# Altium PCB MGMEZZ04.PcbDoc (part 1 of 9)
Units mil, origin at the board's own origin, x right, y up, seen from the top; angles counter-clockwise.
Board outline 3790 x 5472.44 mil, 10 copper layers (TopLayer, InternalPlane1, MidLayer1, InternalPlane2, MidLayer2, MidLayer3, InternalPlane3, MidLayer4, InternalPlane4, BottomLayer), stack 57.08 mil thick; 846 components, 745 nets, 3323 pads, 1906 vias.
Unrouted connection lines stored in the file: 128.
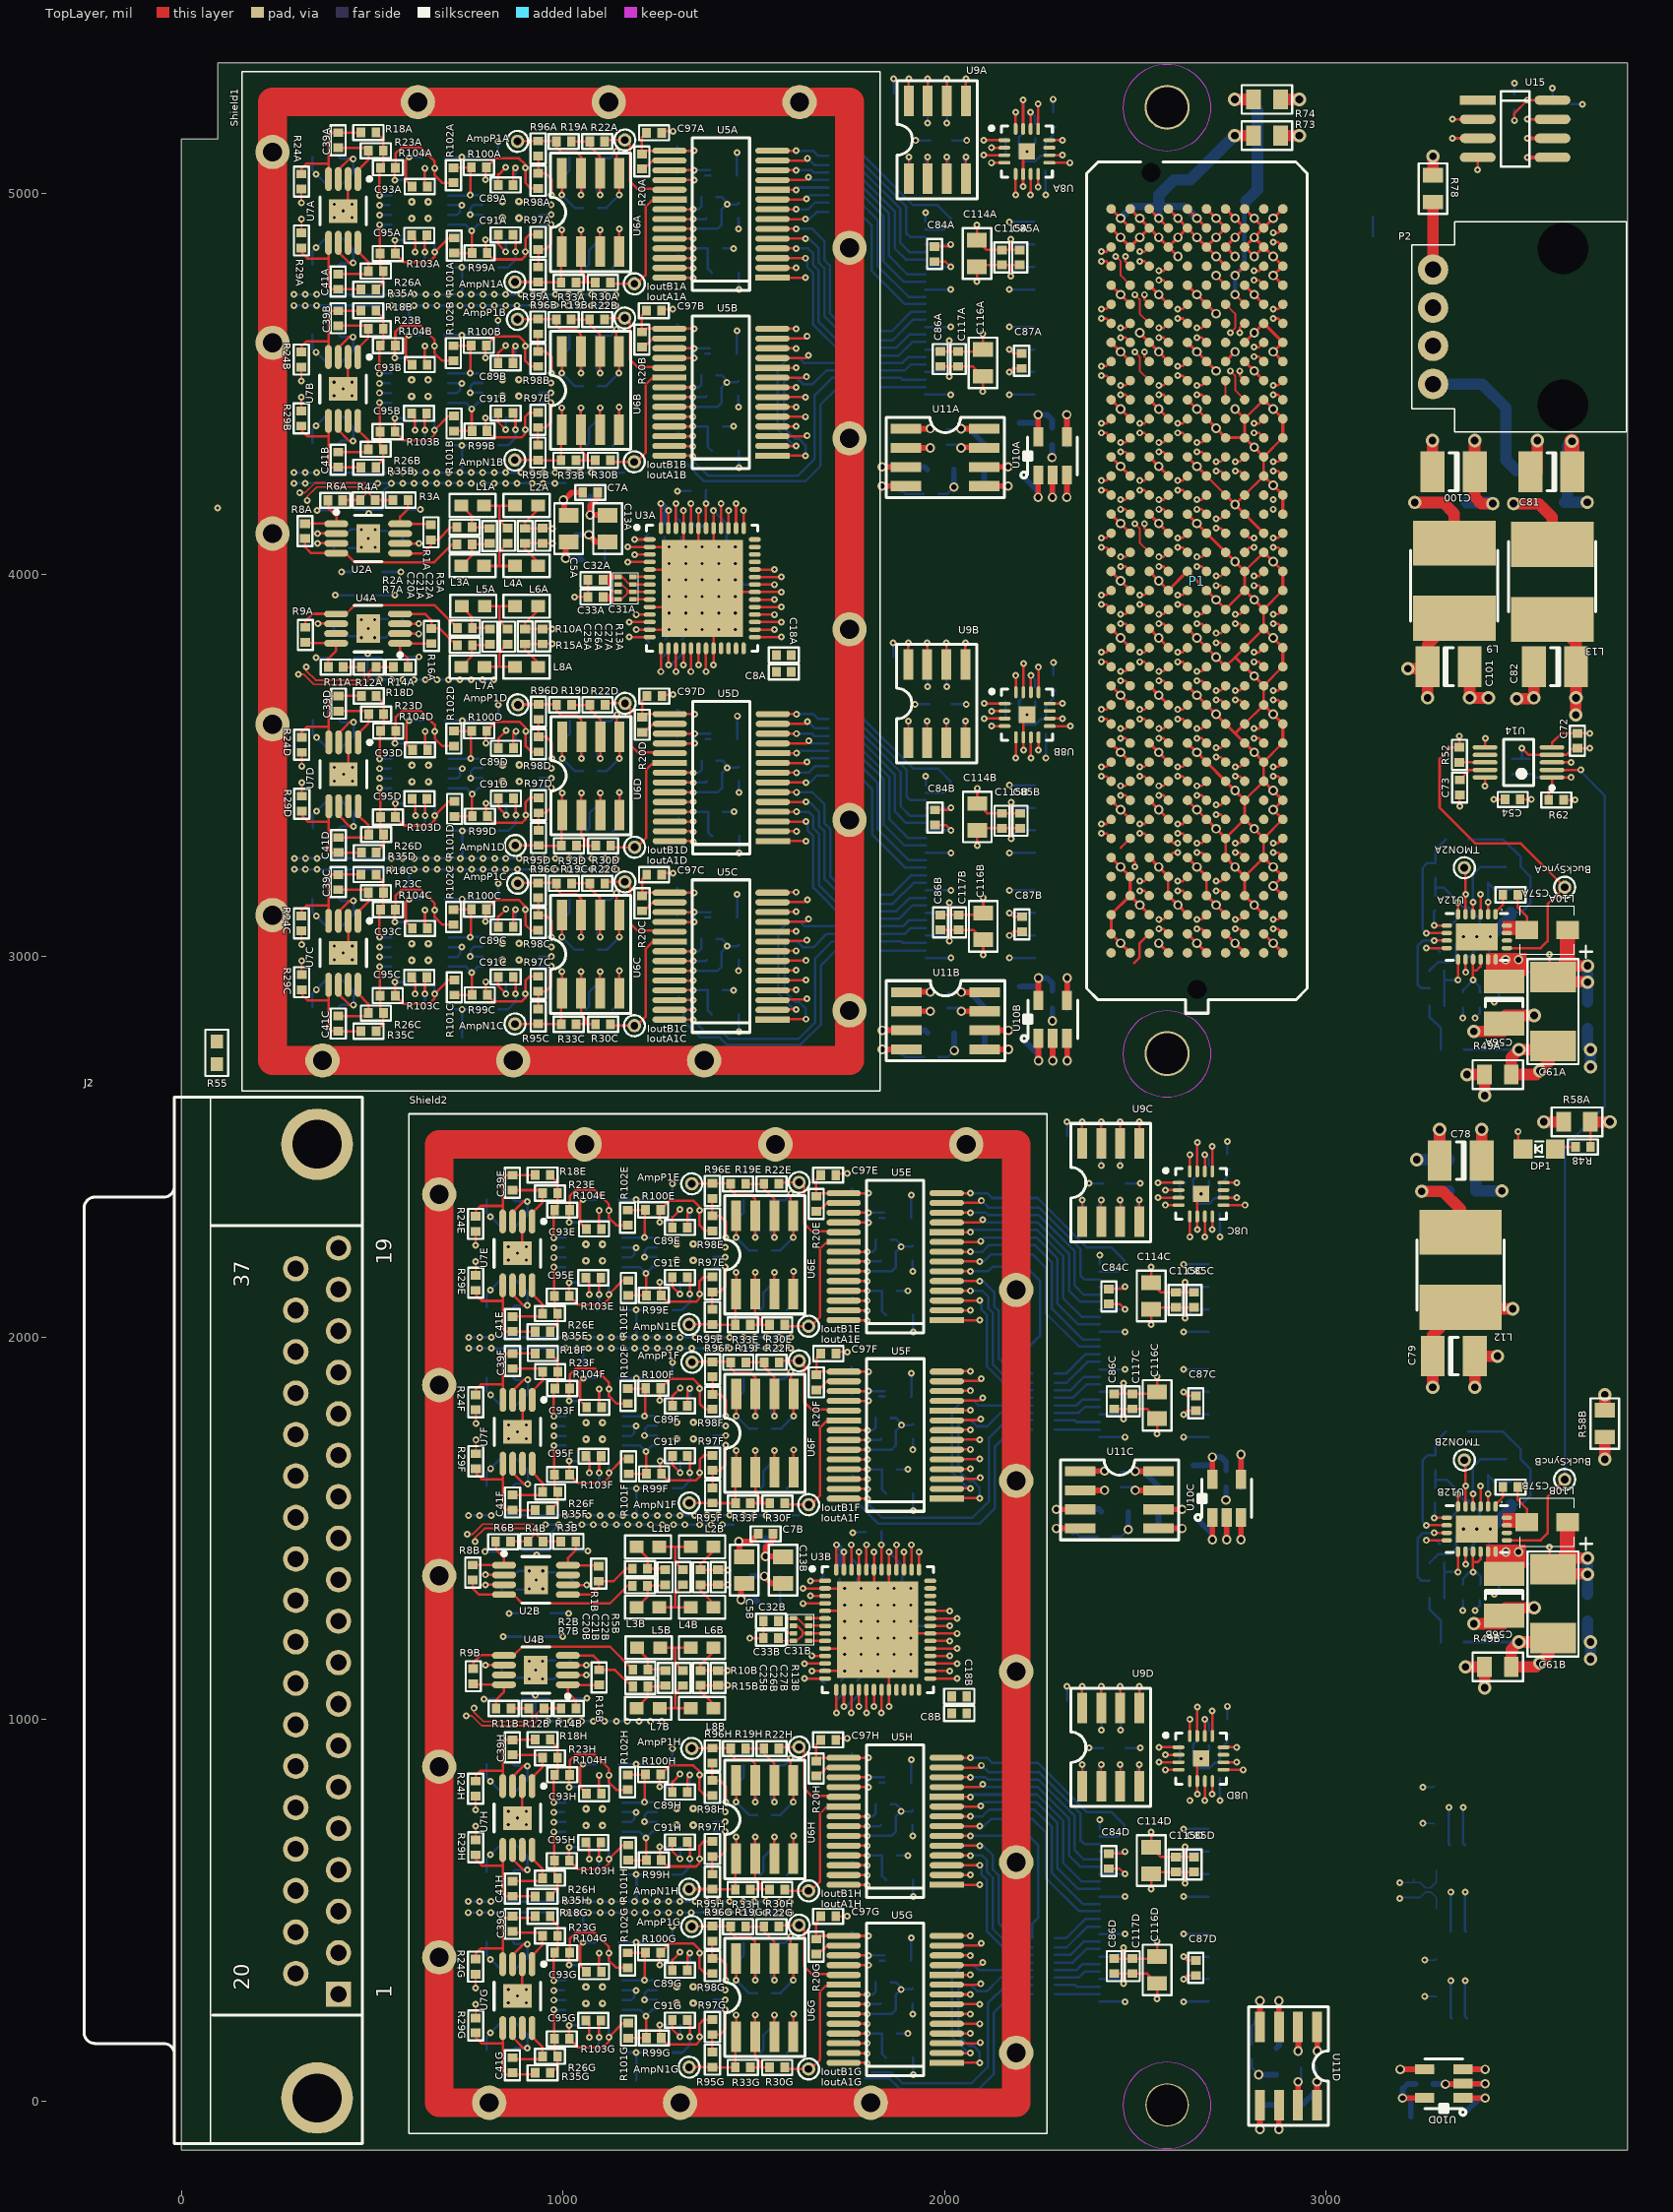
[diagram p0: TopLayer view]
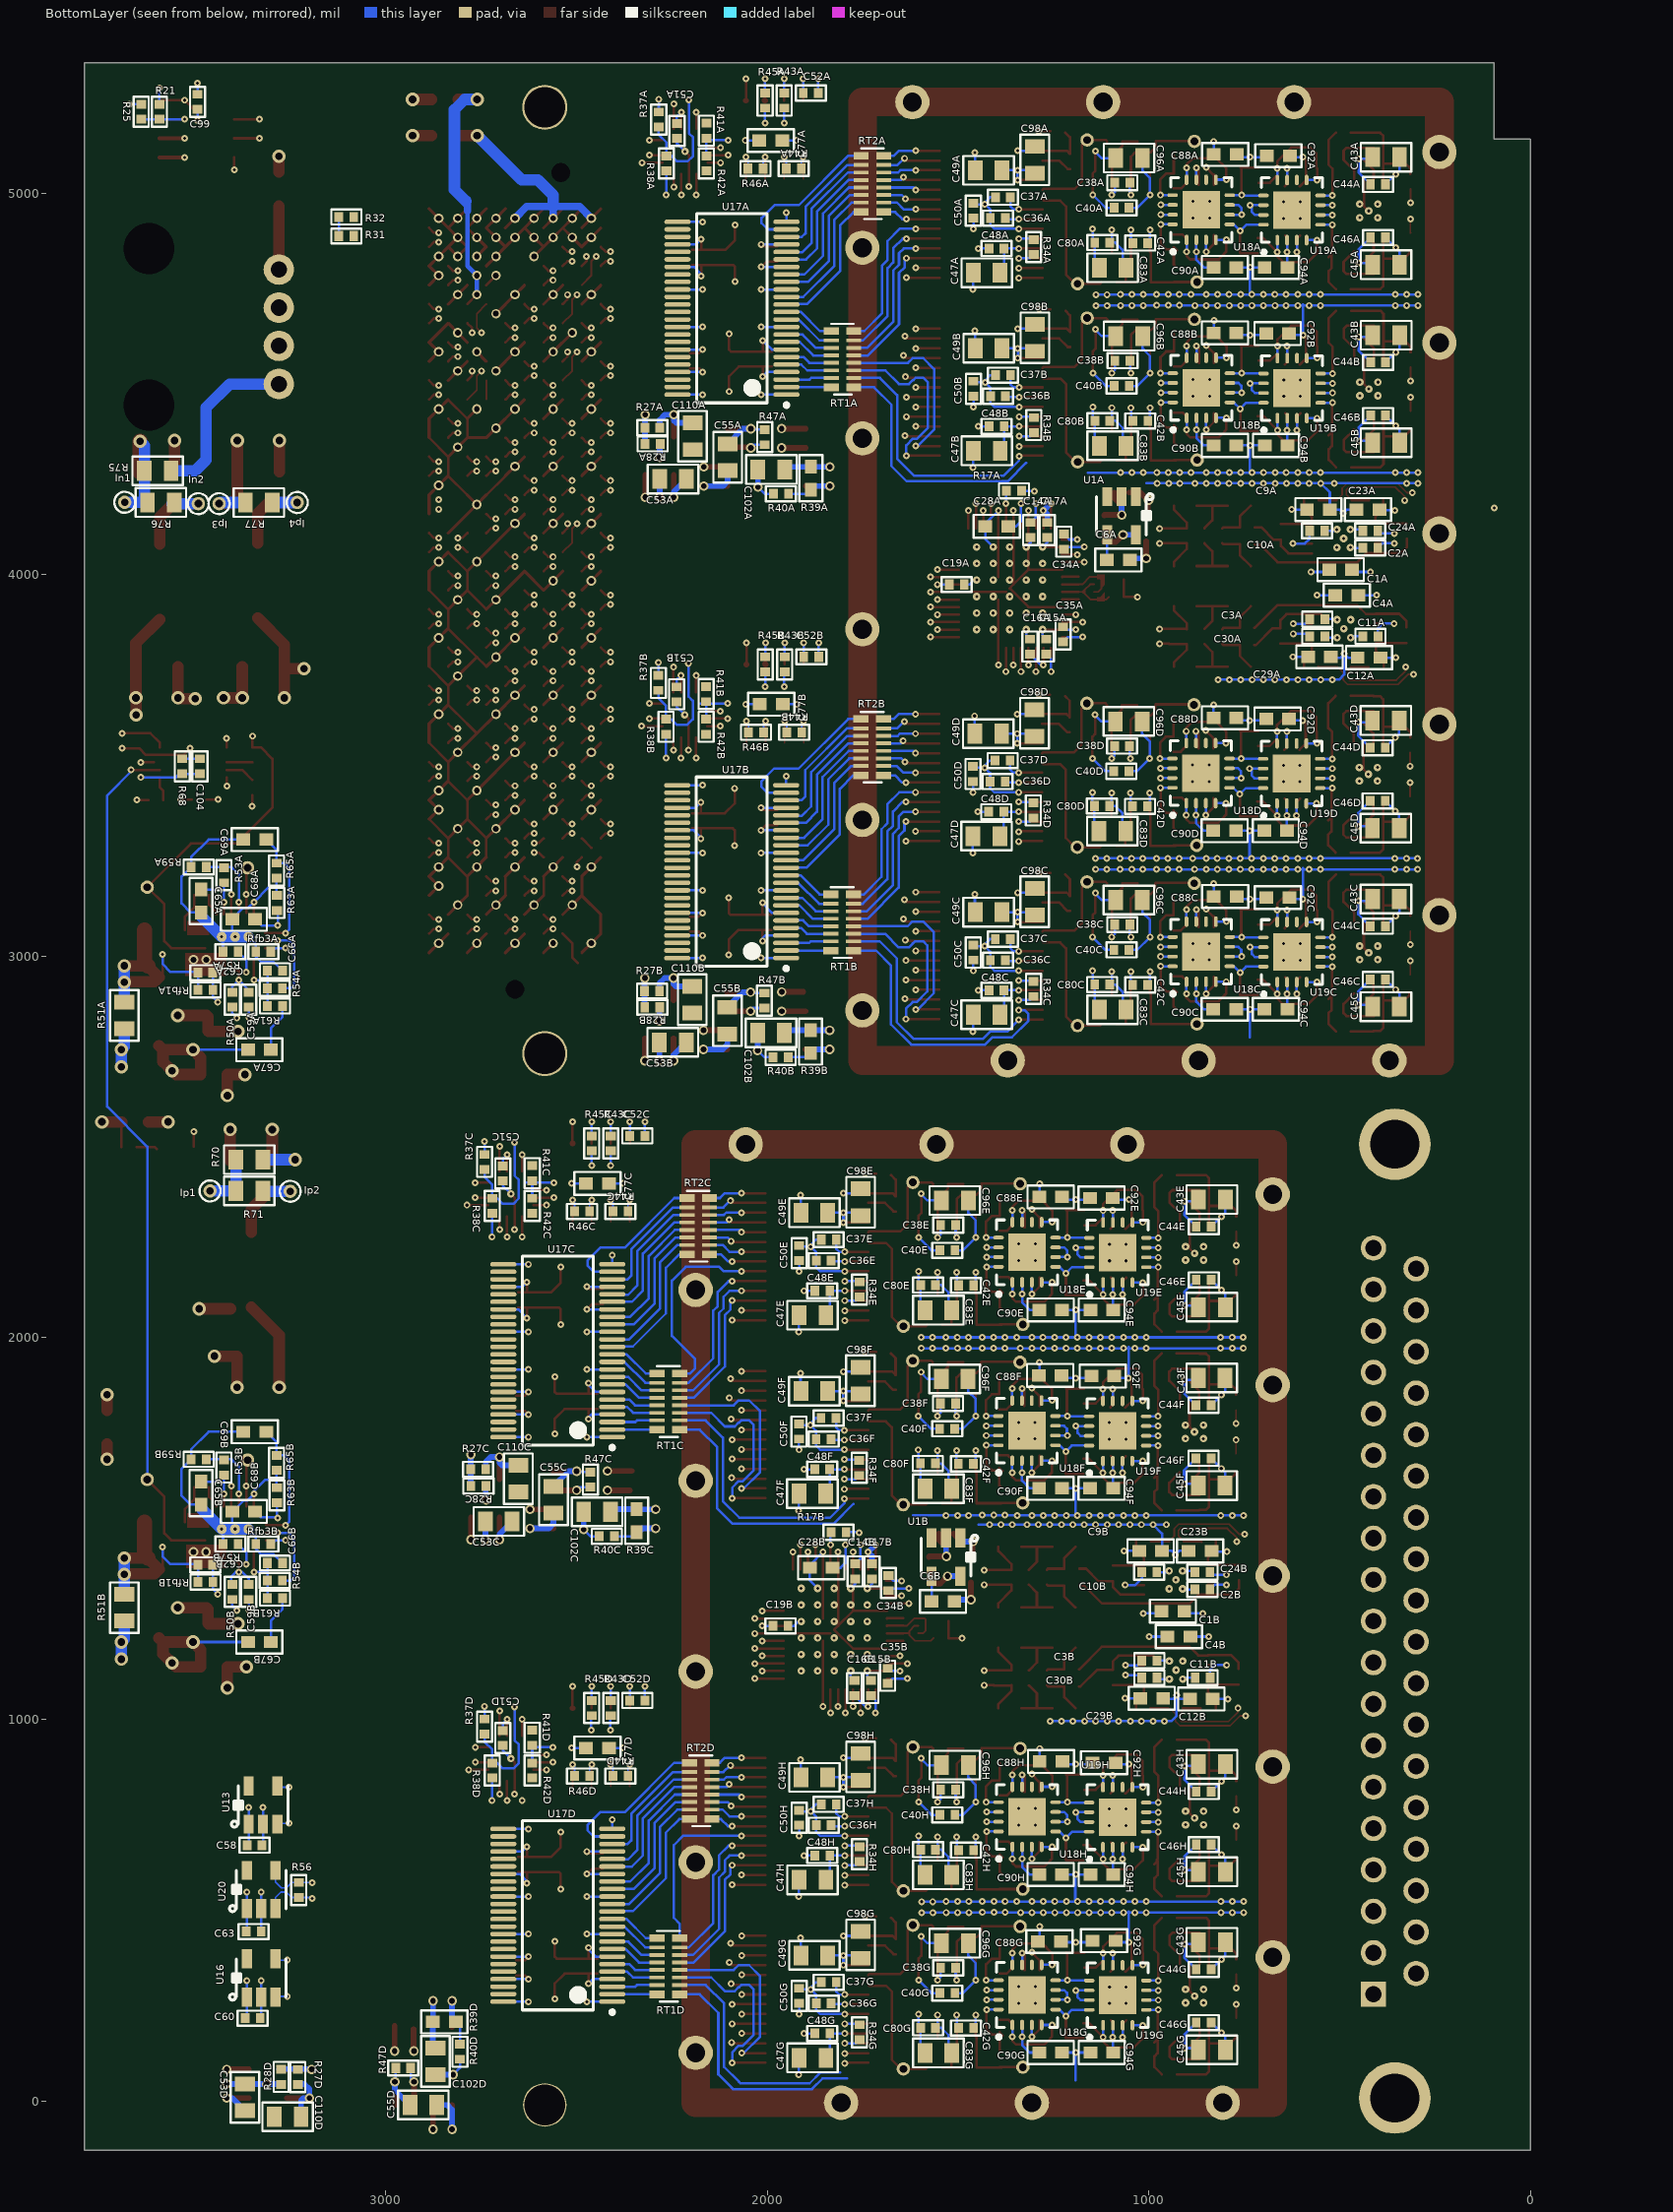
[diagram p1: BottomLayer view, seen from below]
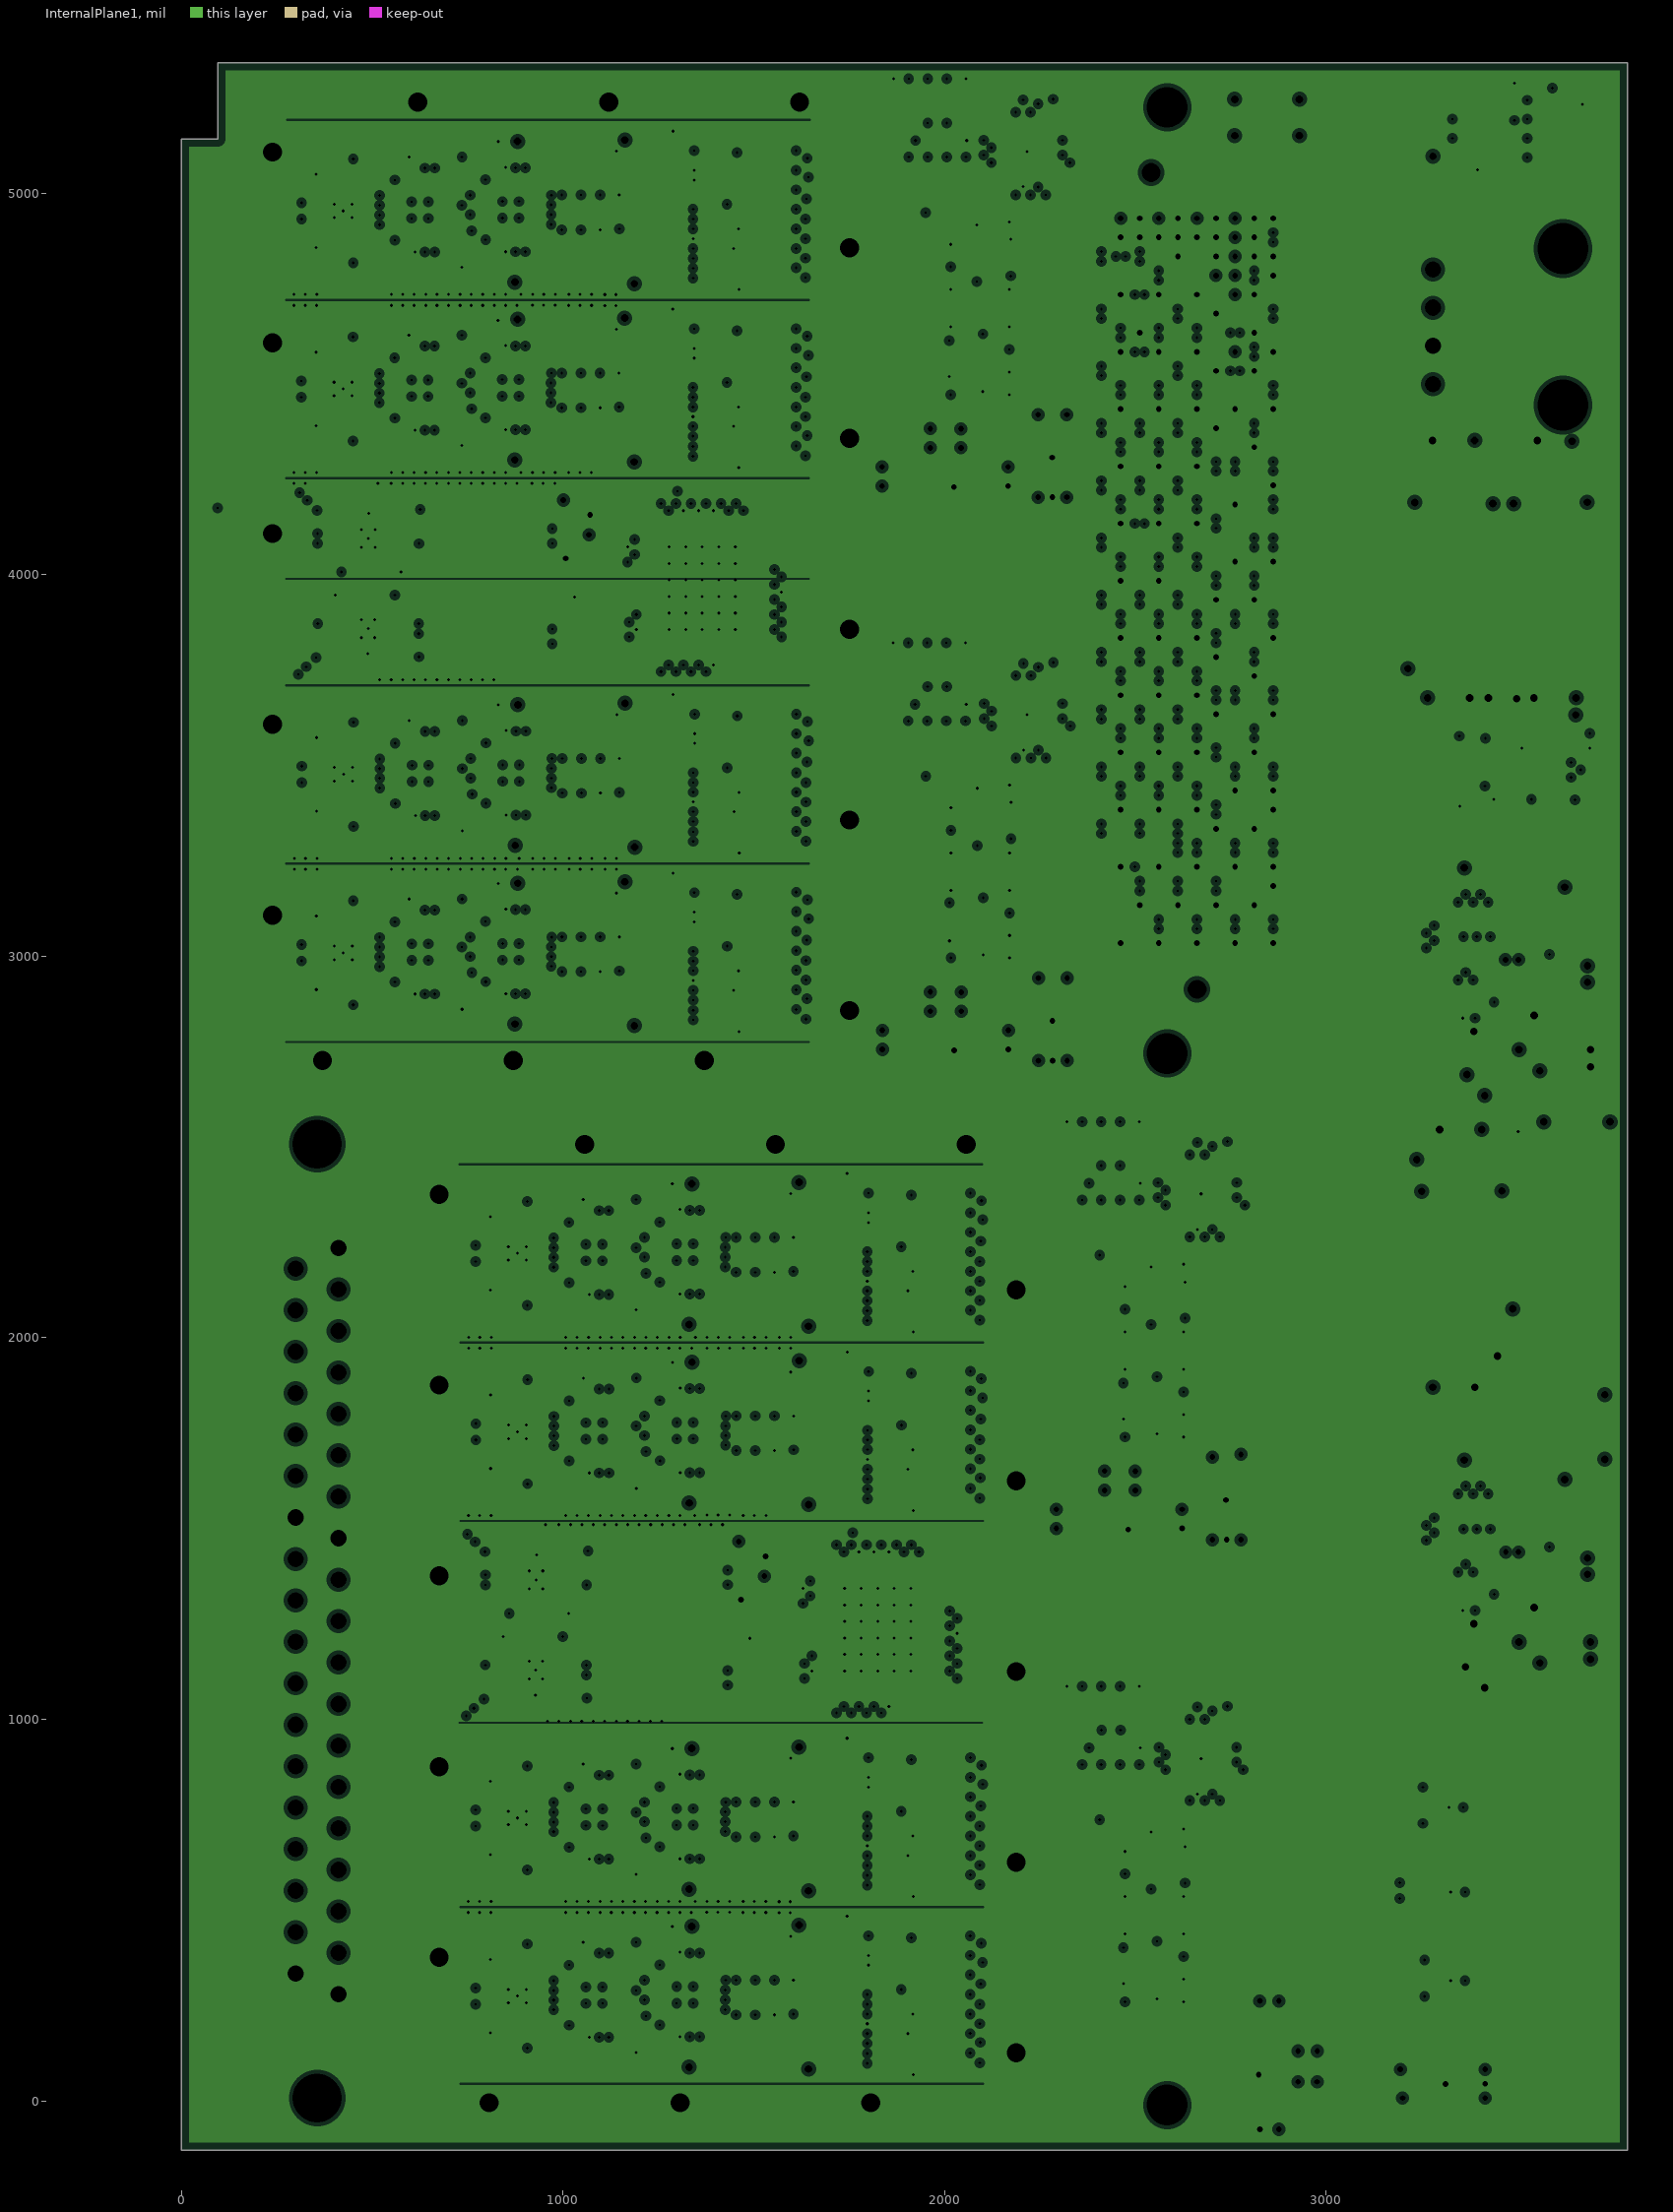
[diagram p2: InternalPlane1, clearances drawn from the general rule]
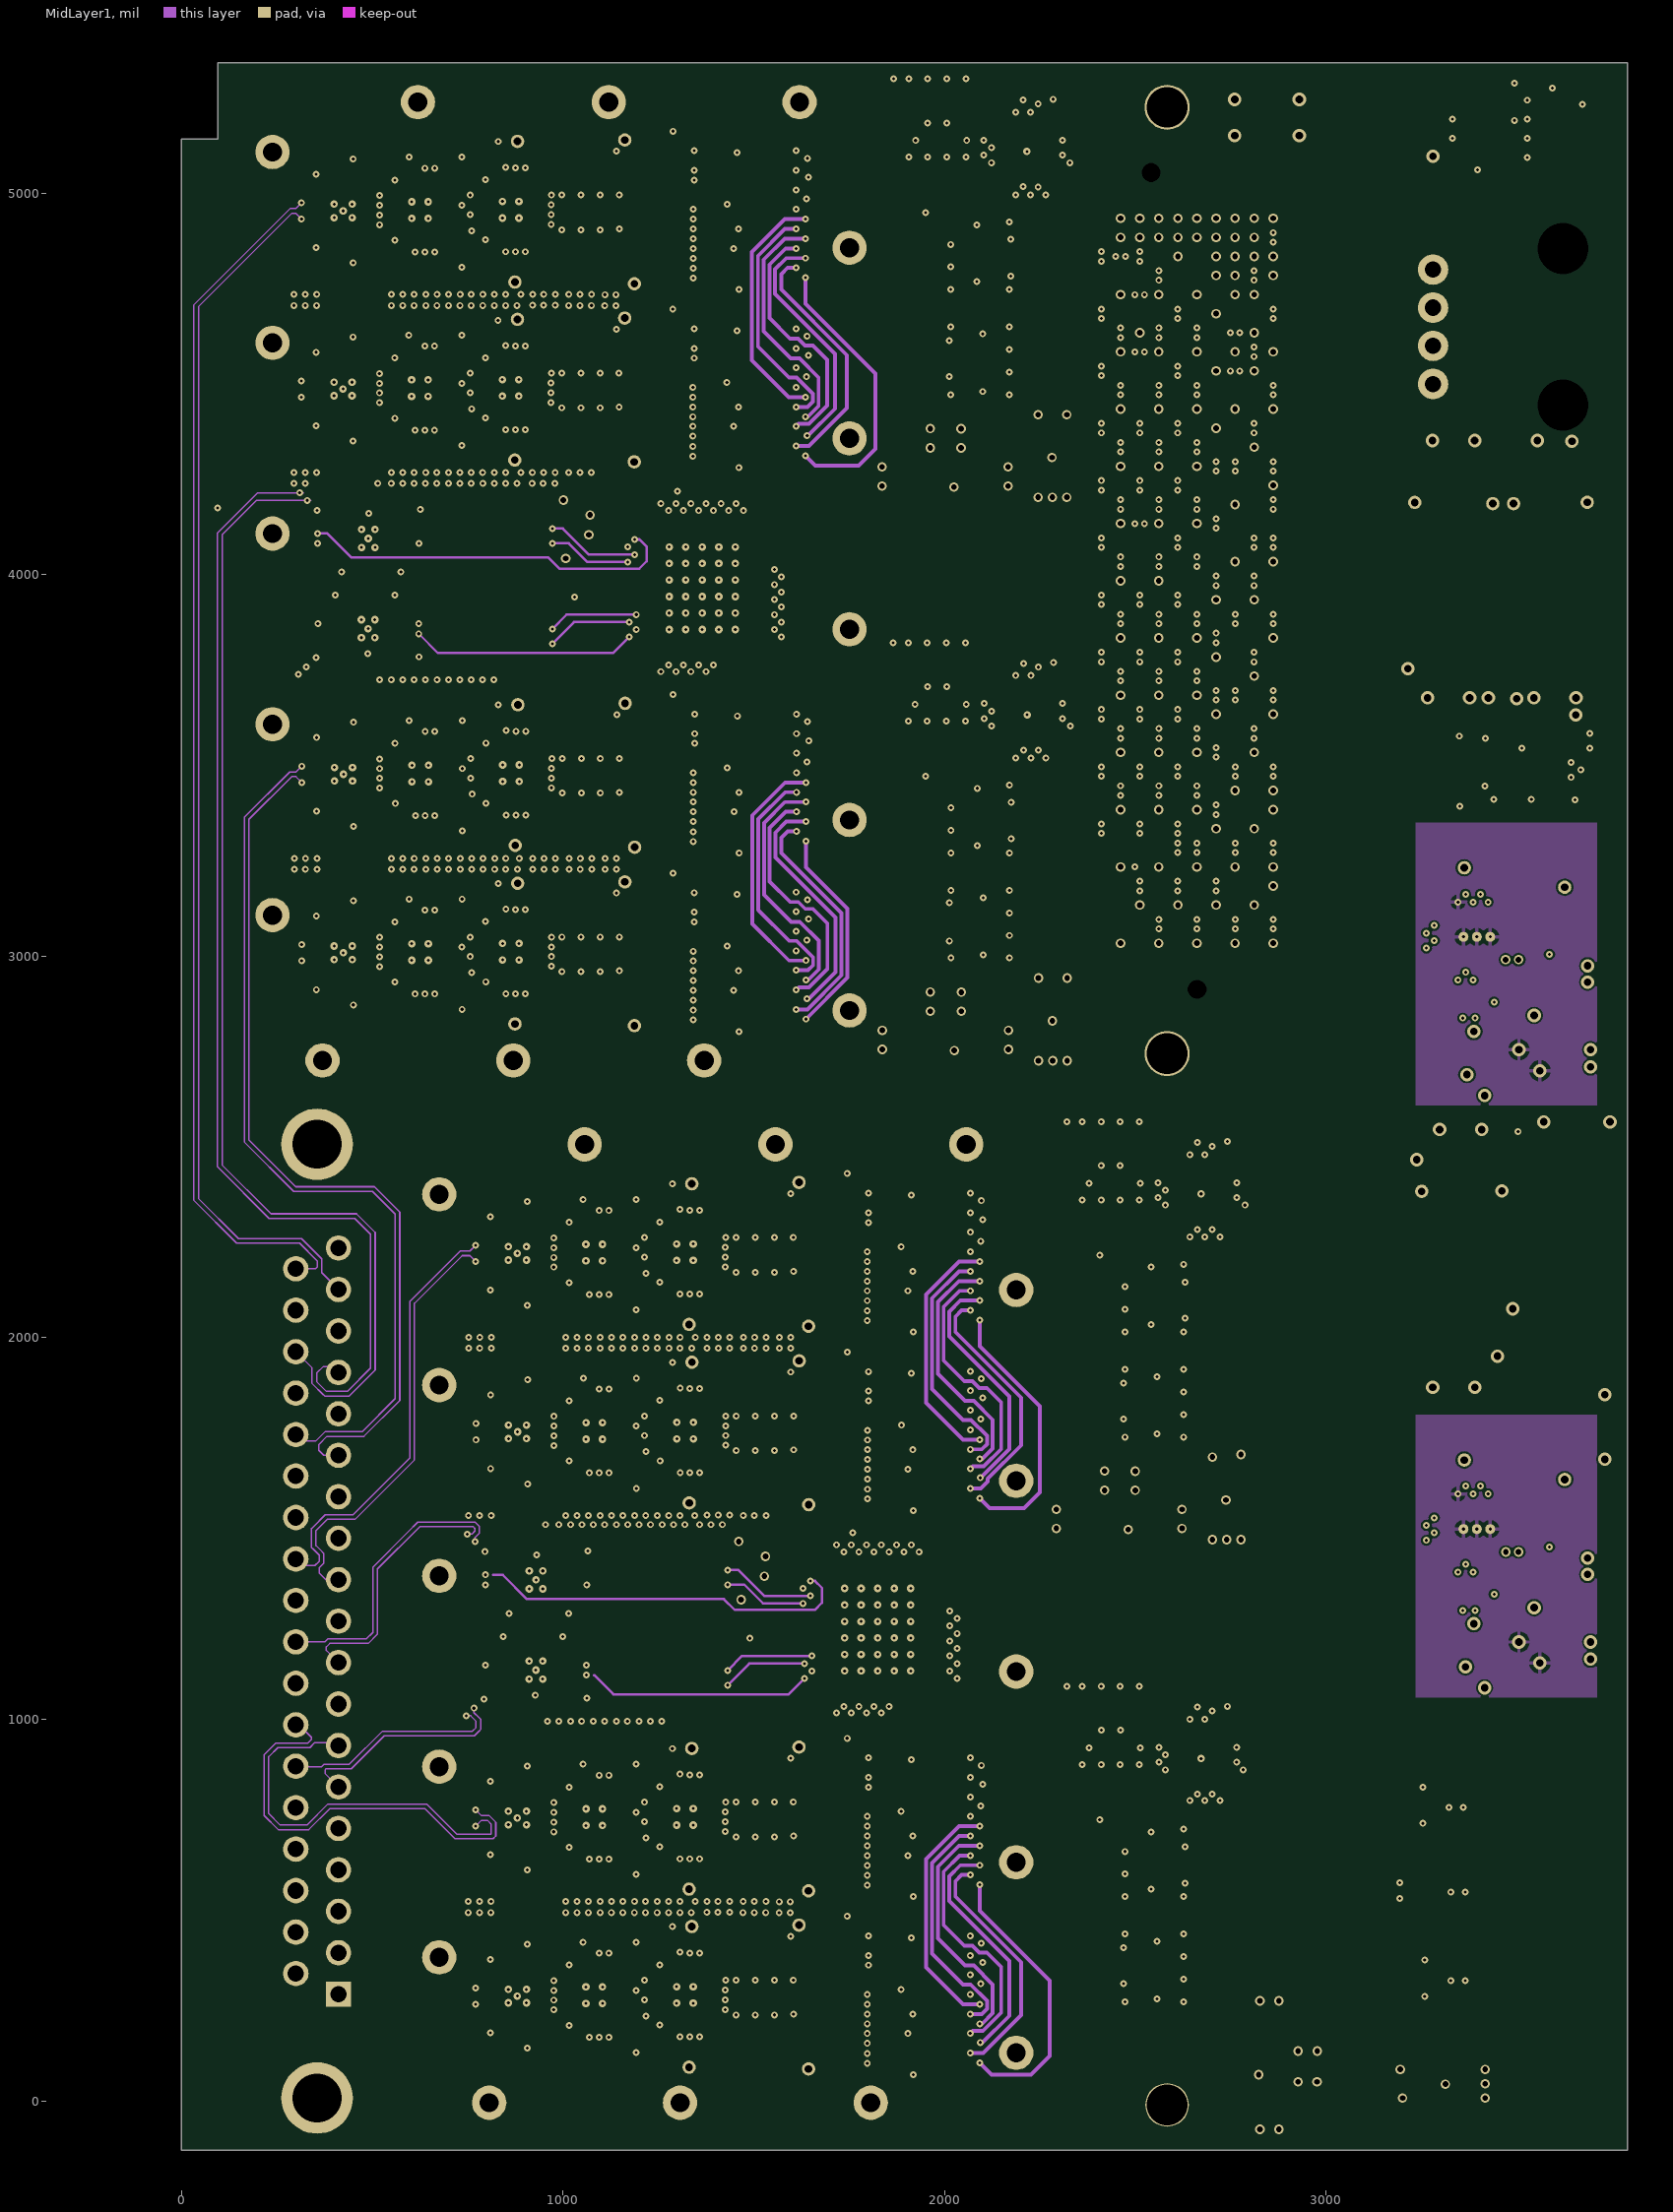
[diagram p3: MidLayer1]
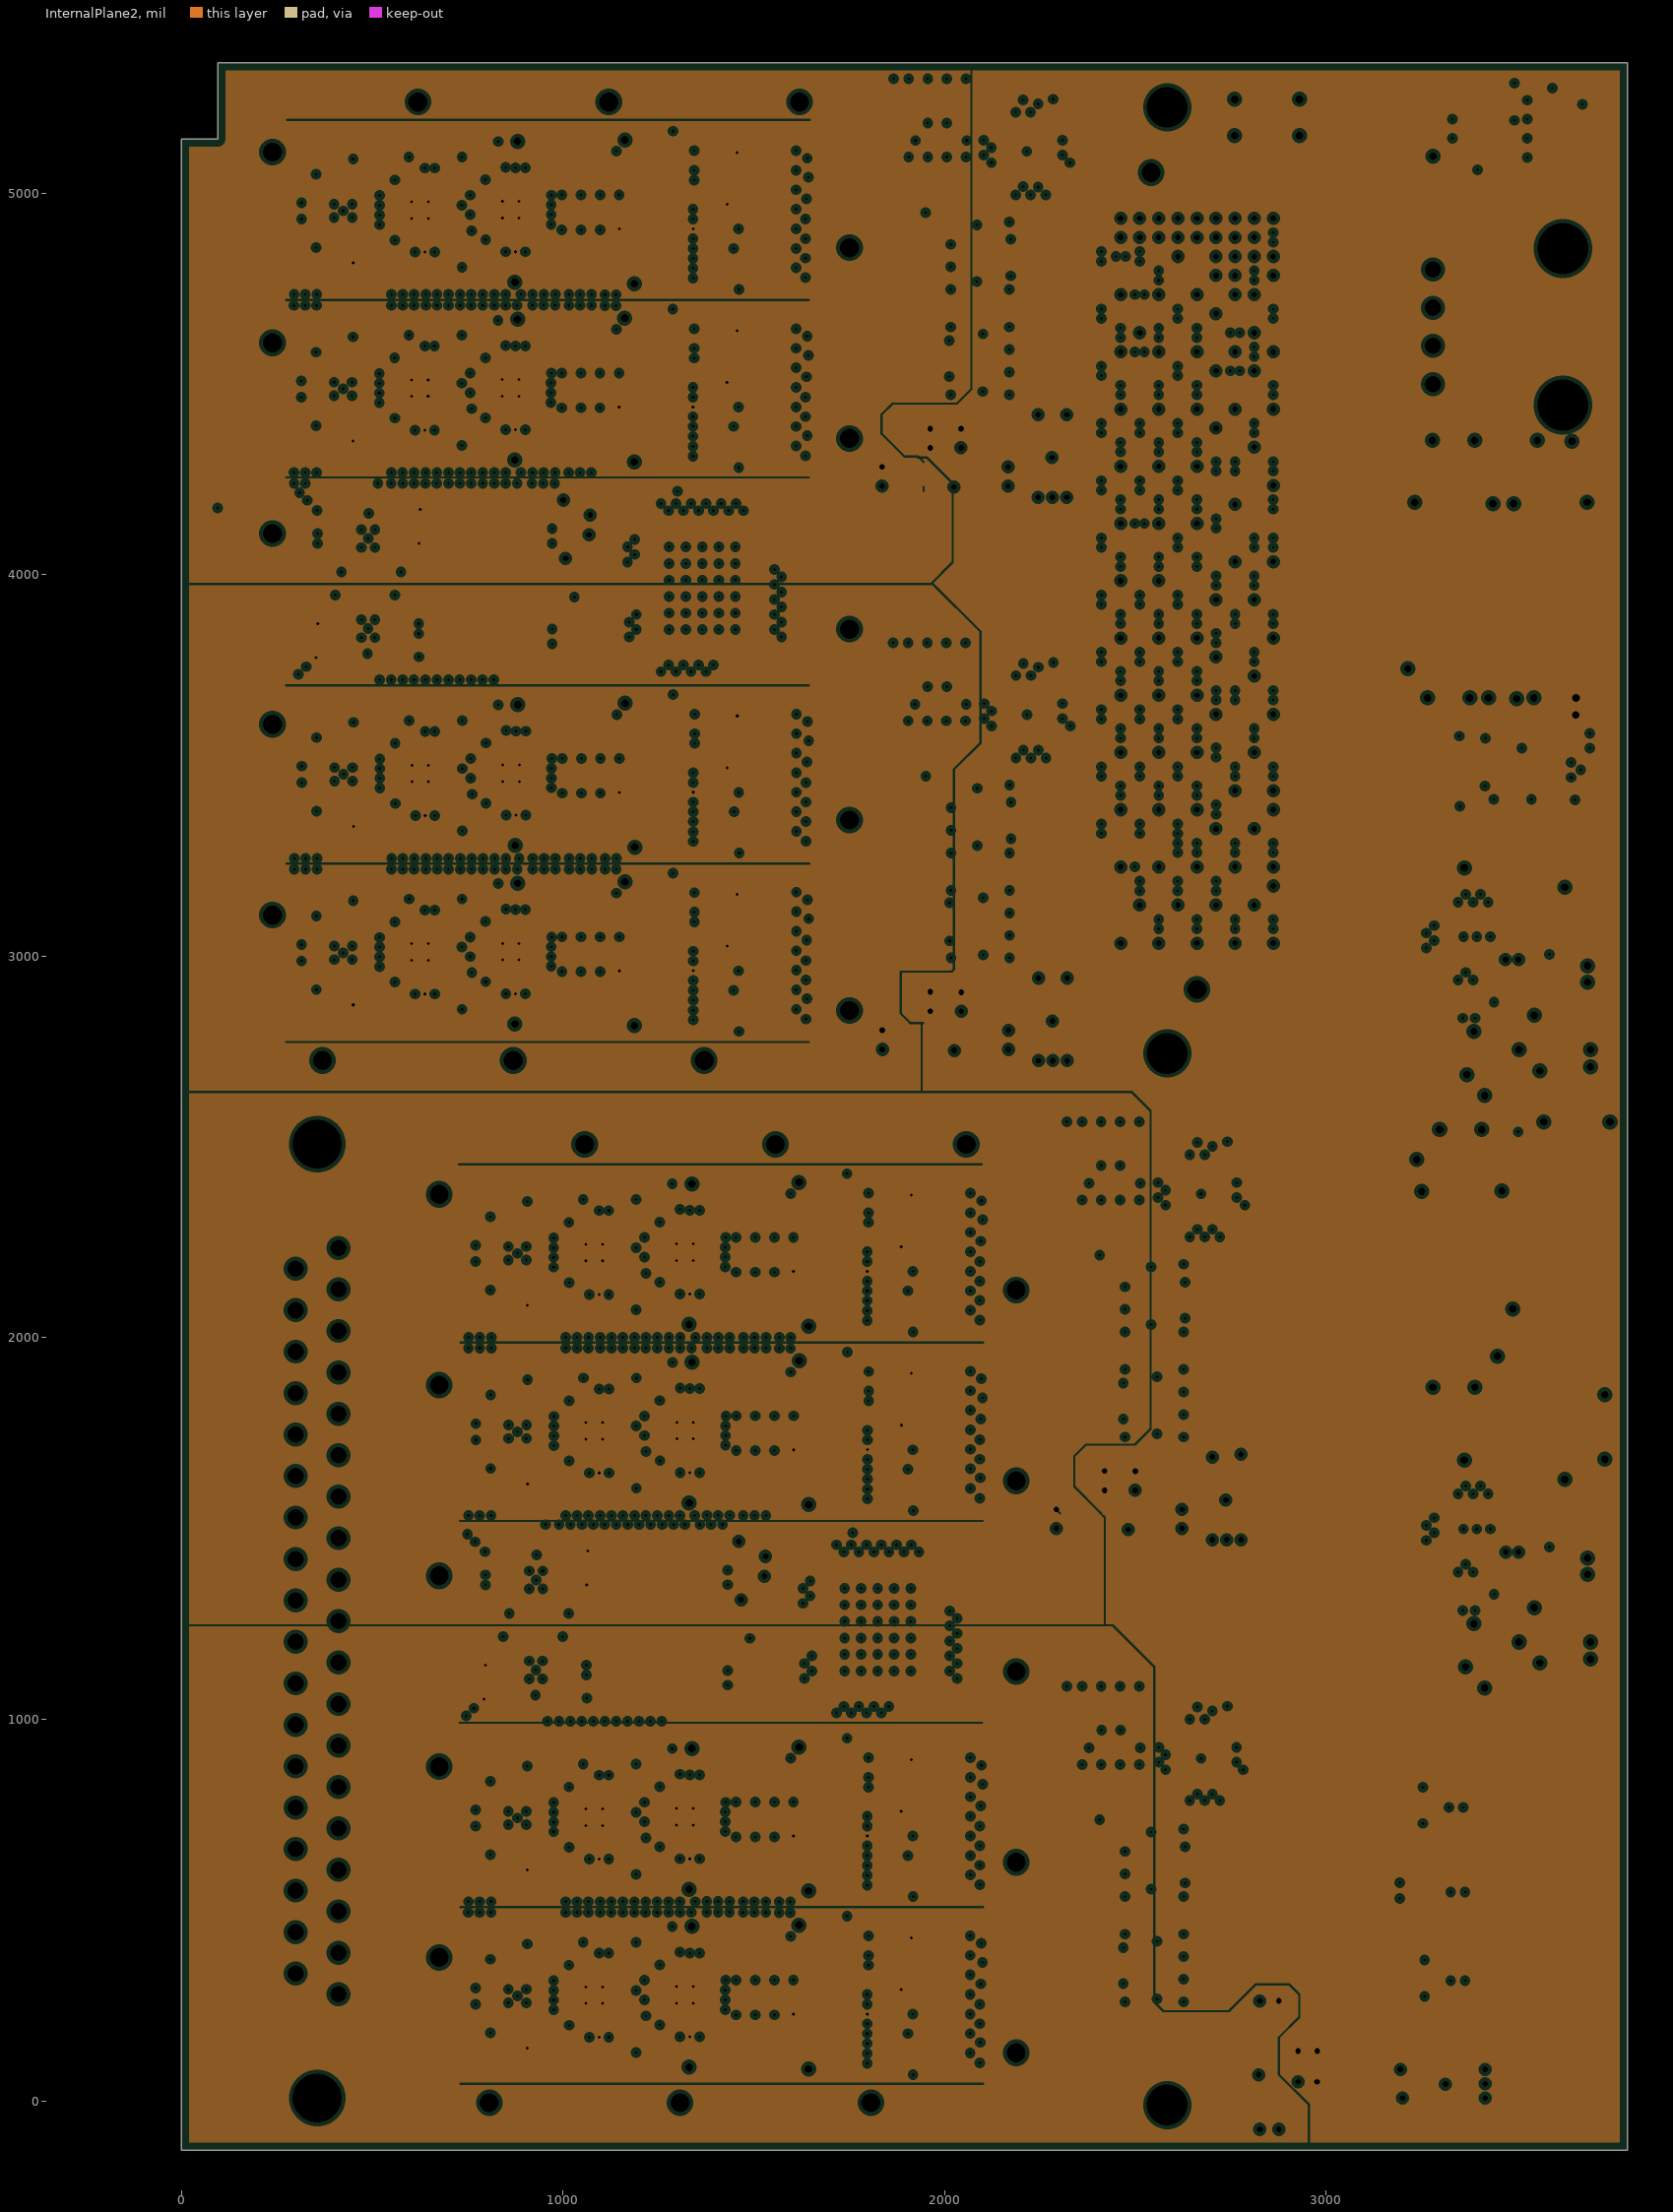
[diagram p4: InternalPlane2, clearances drawn from the general rule]
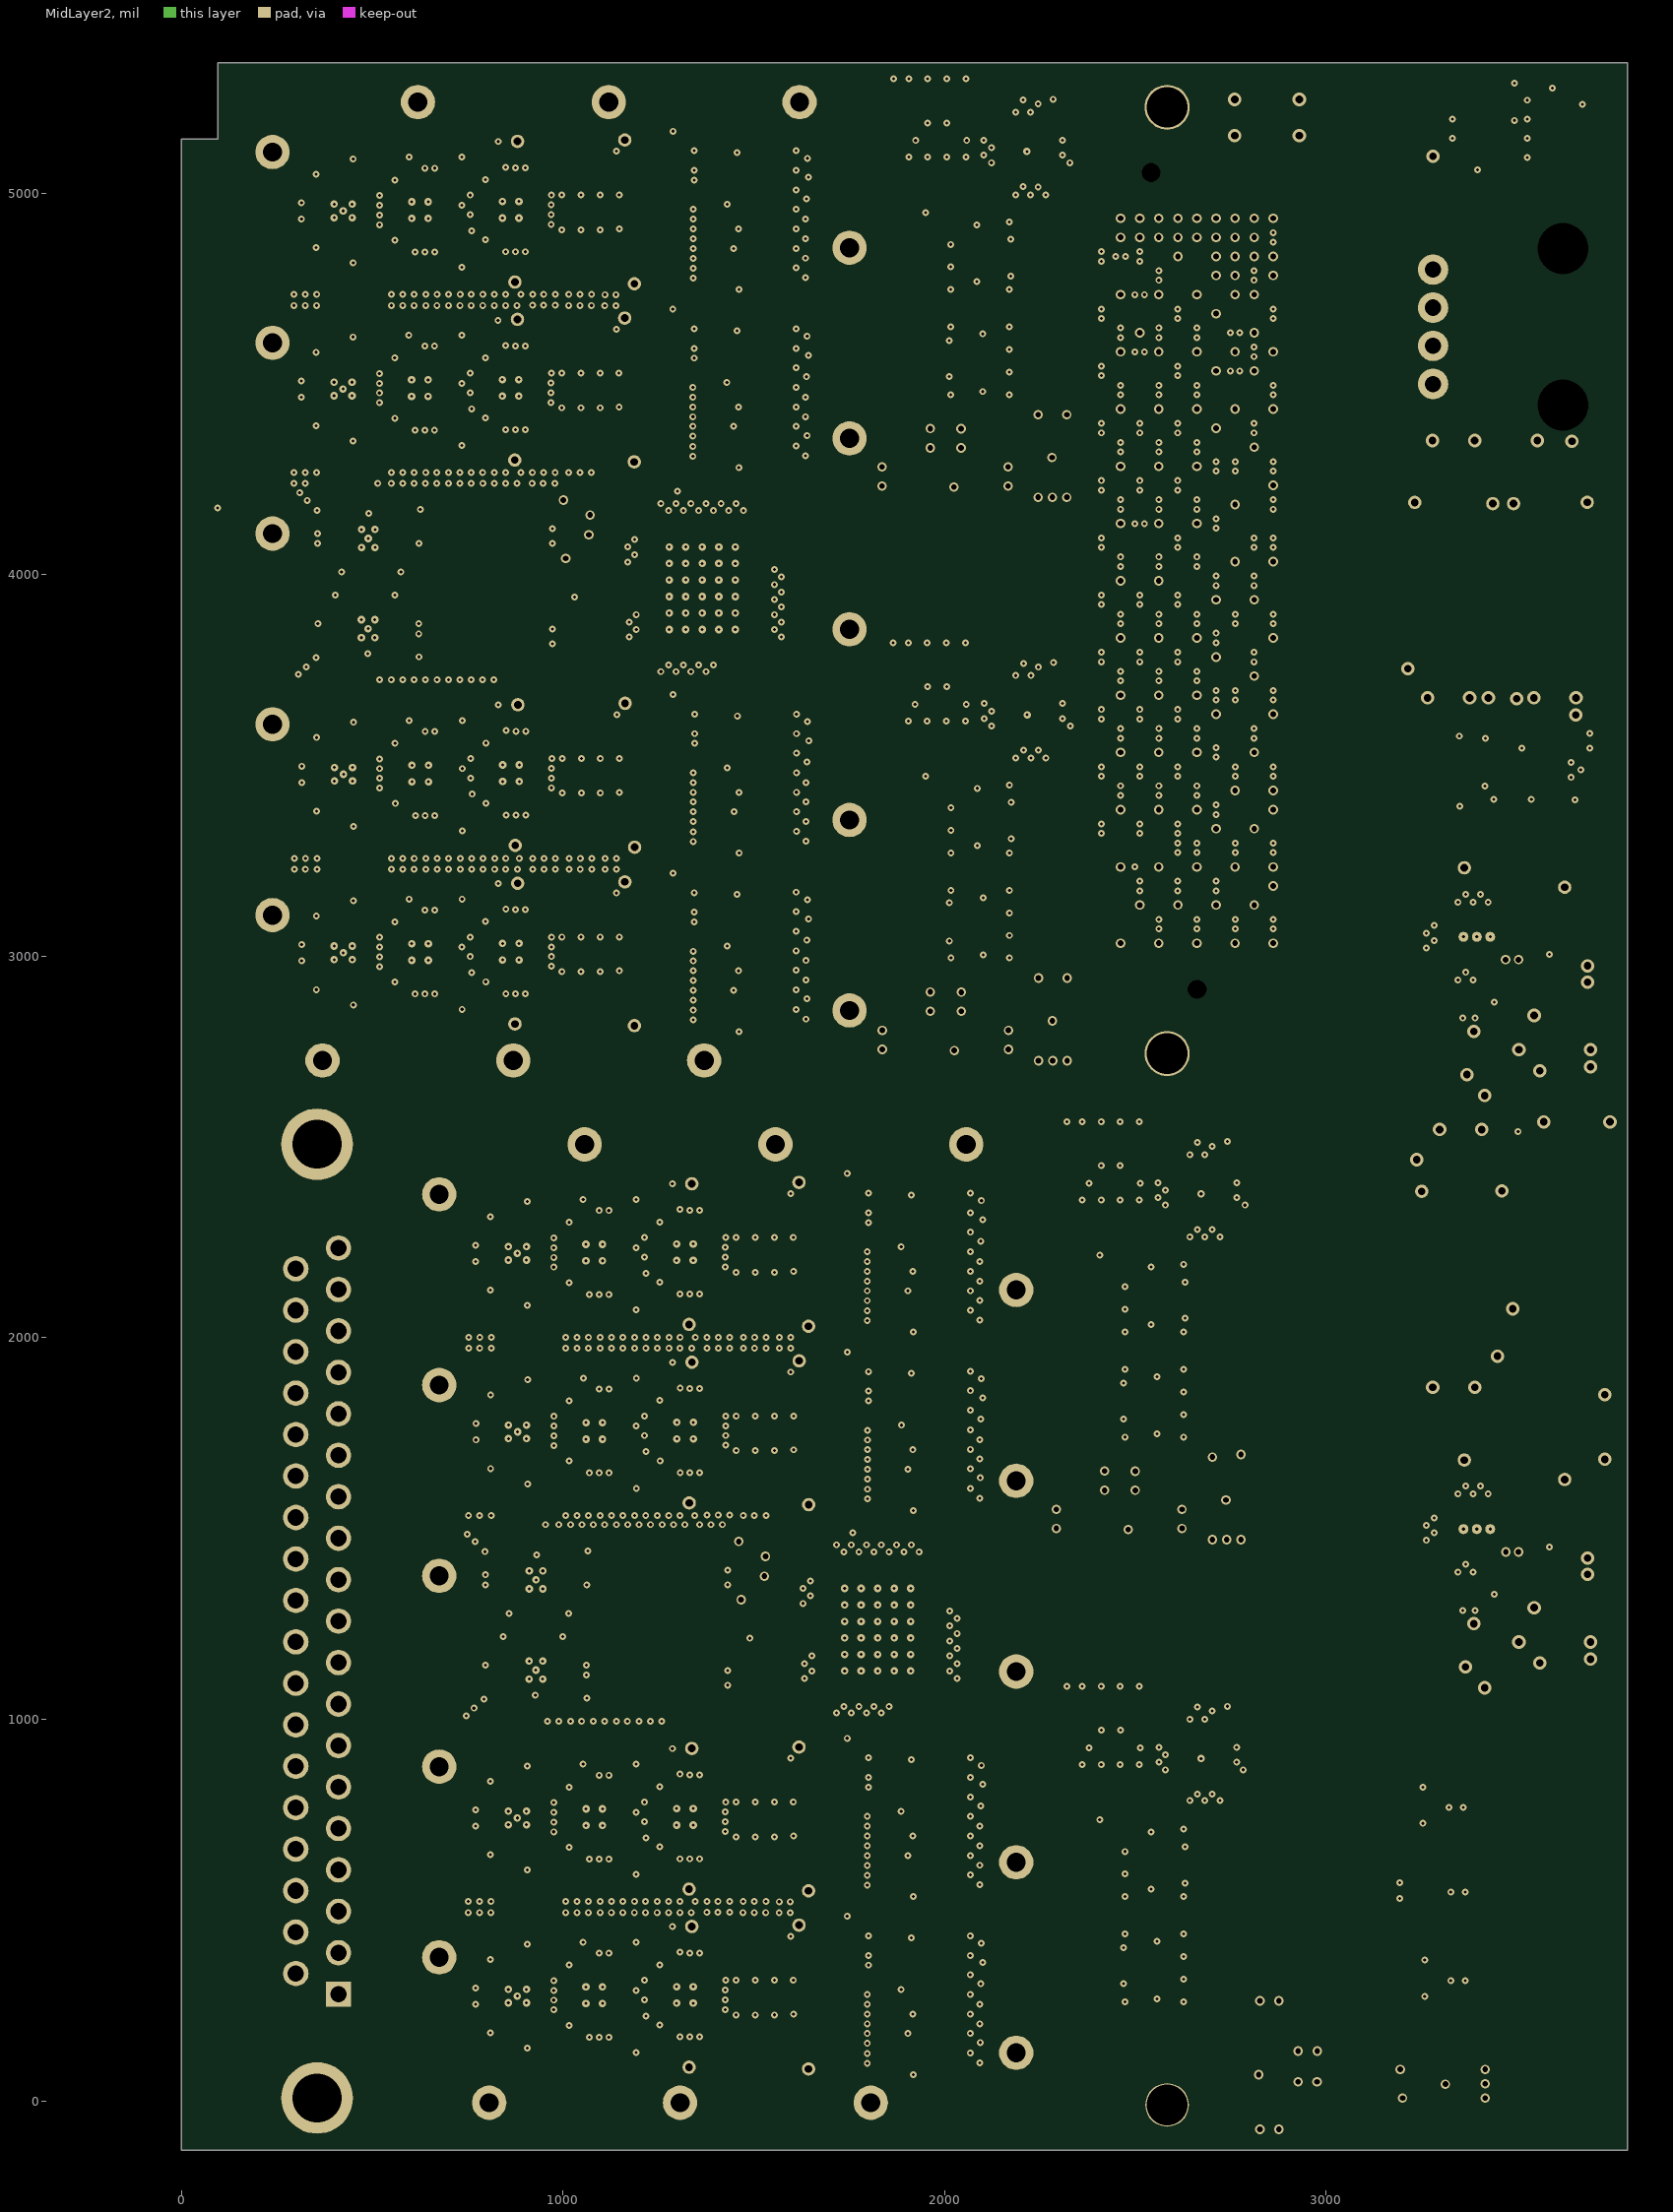
[diagram p5: MidLayer2]
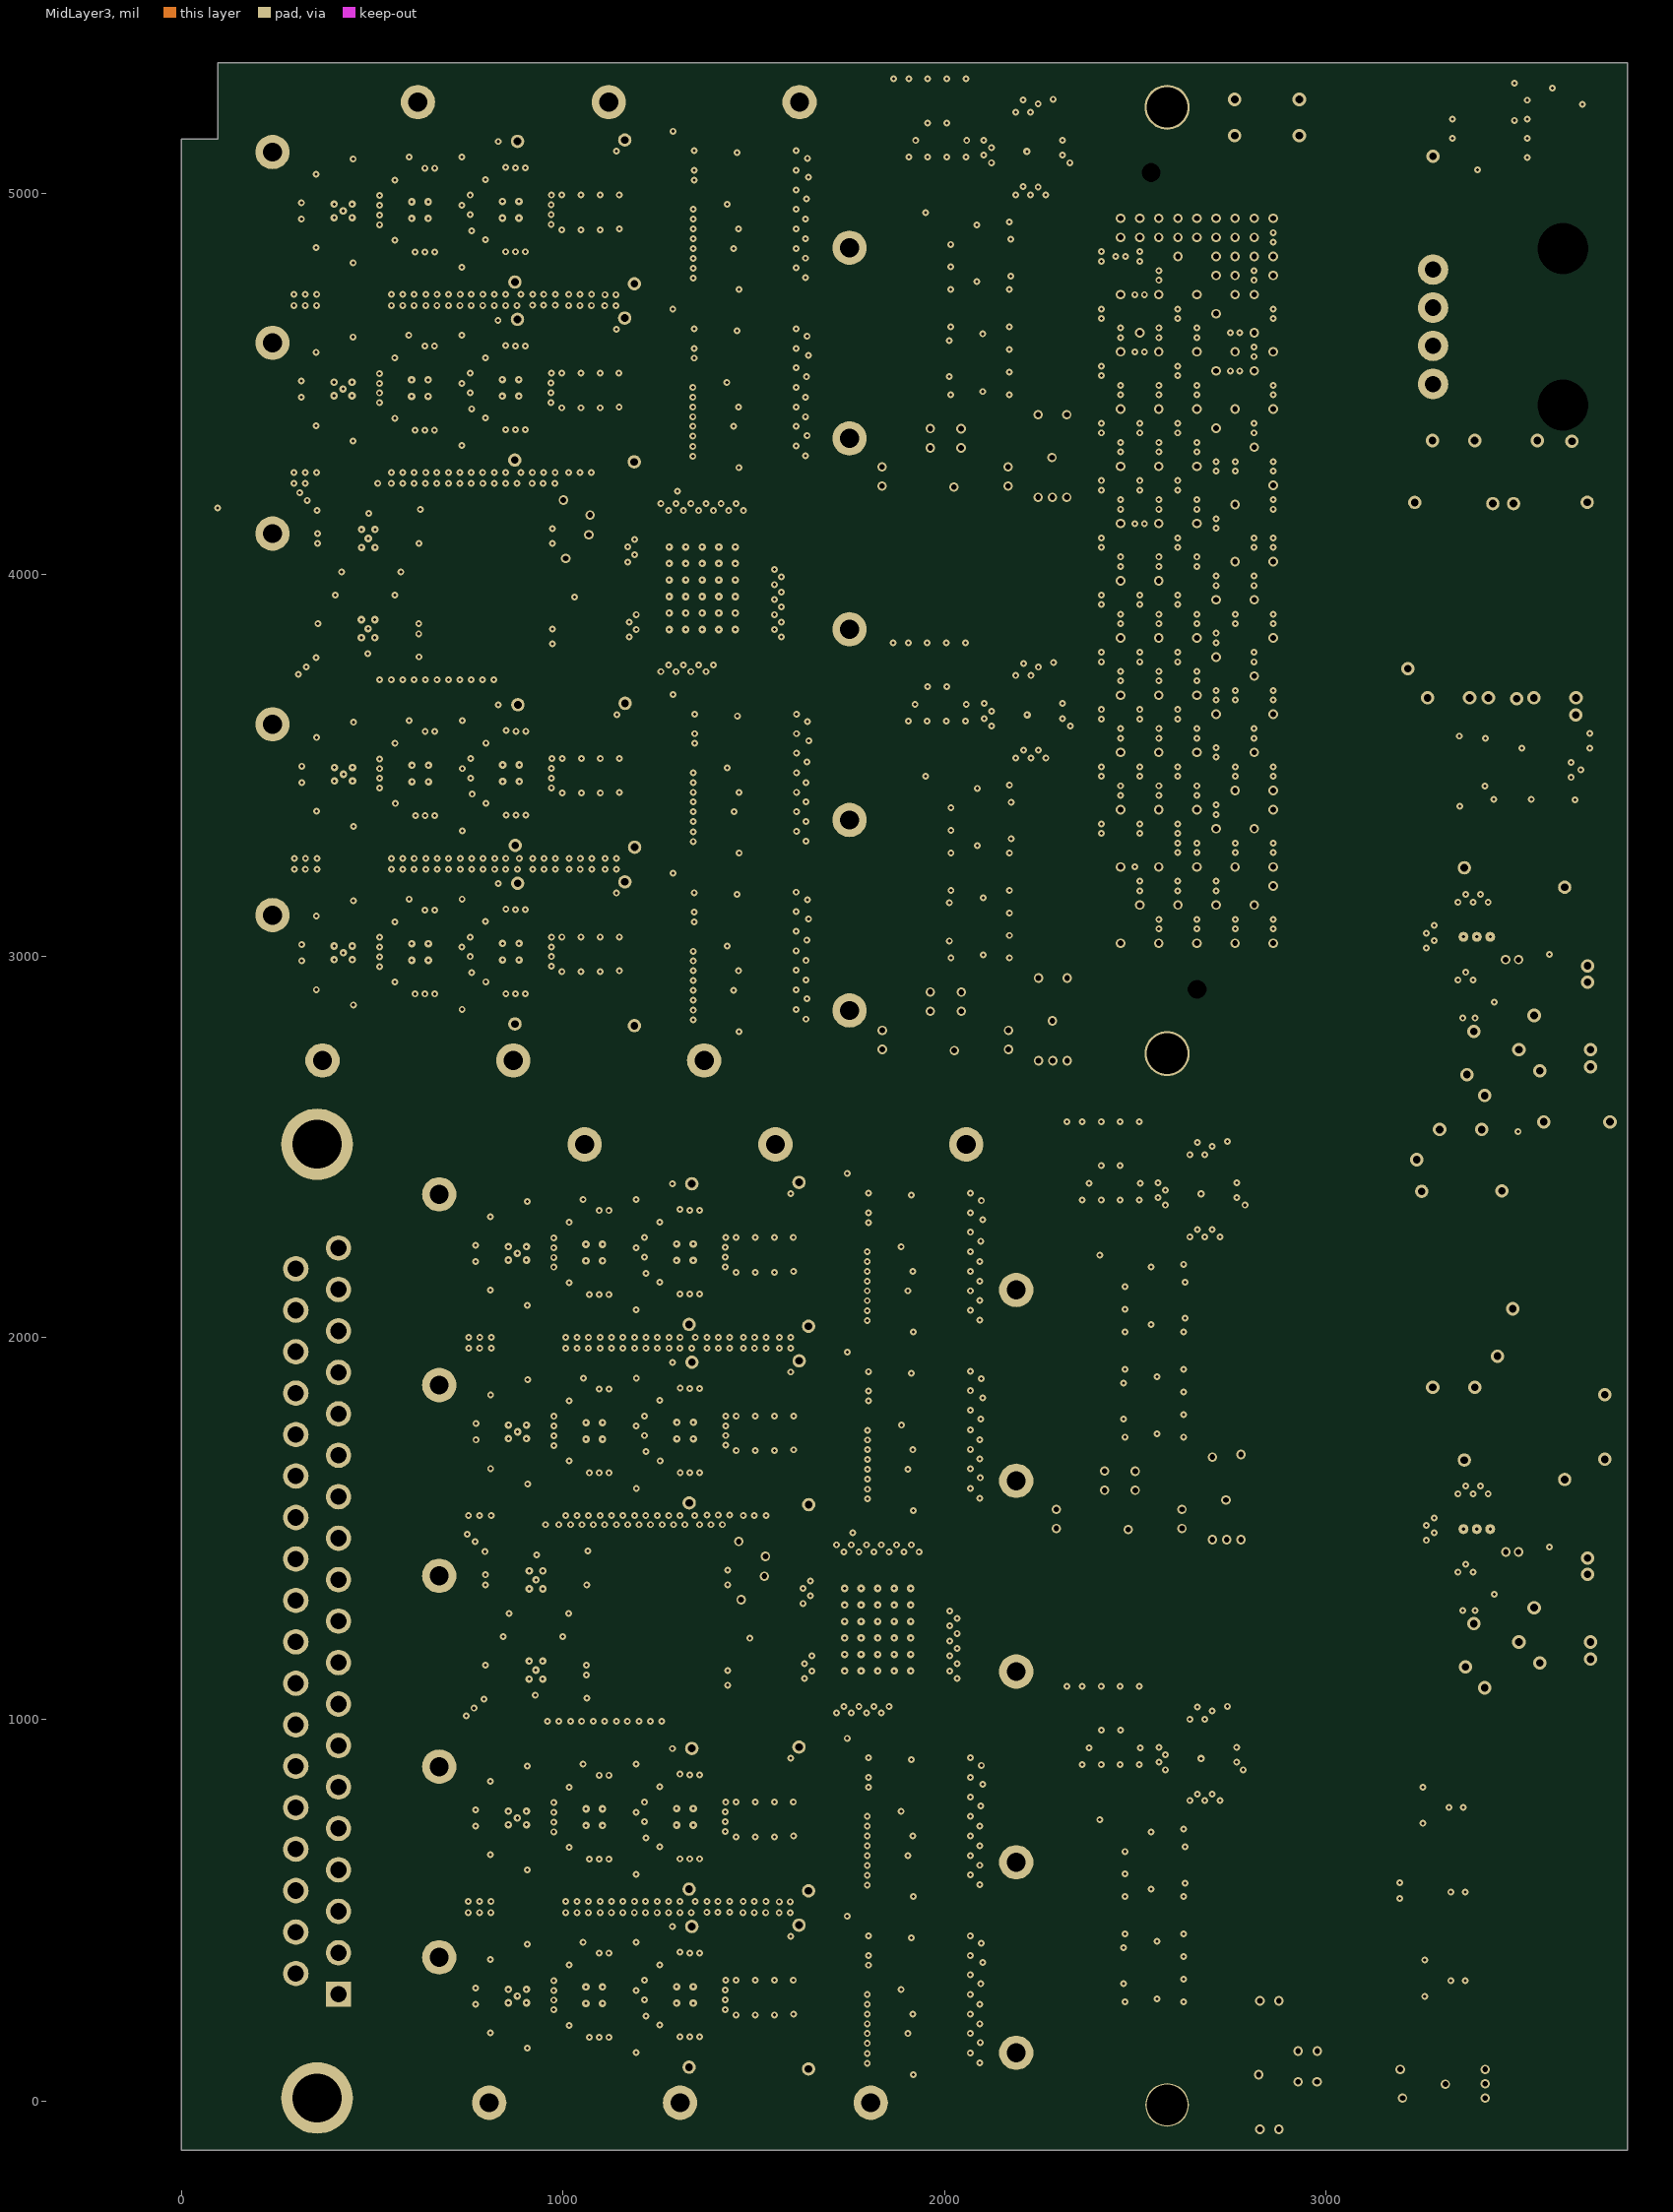
[diagram p6: MidLayer3]
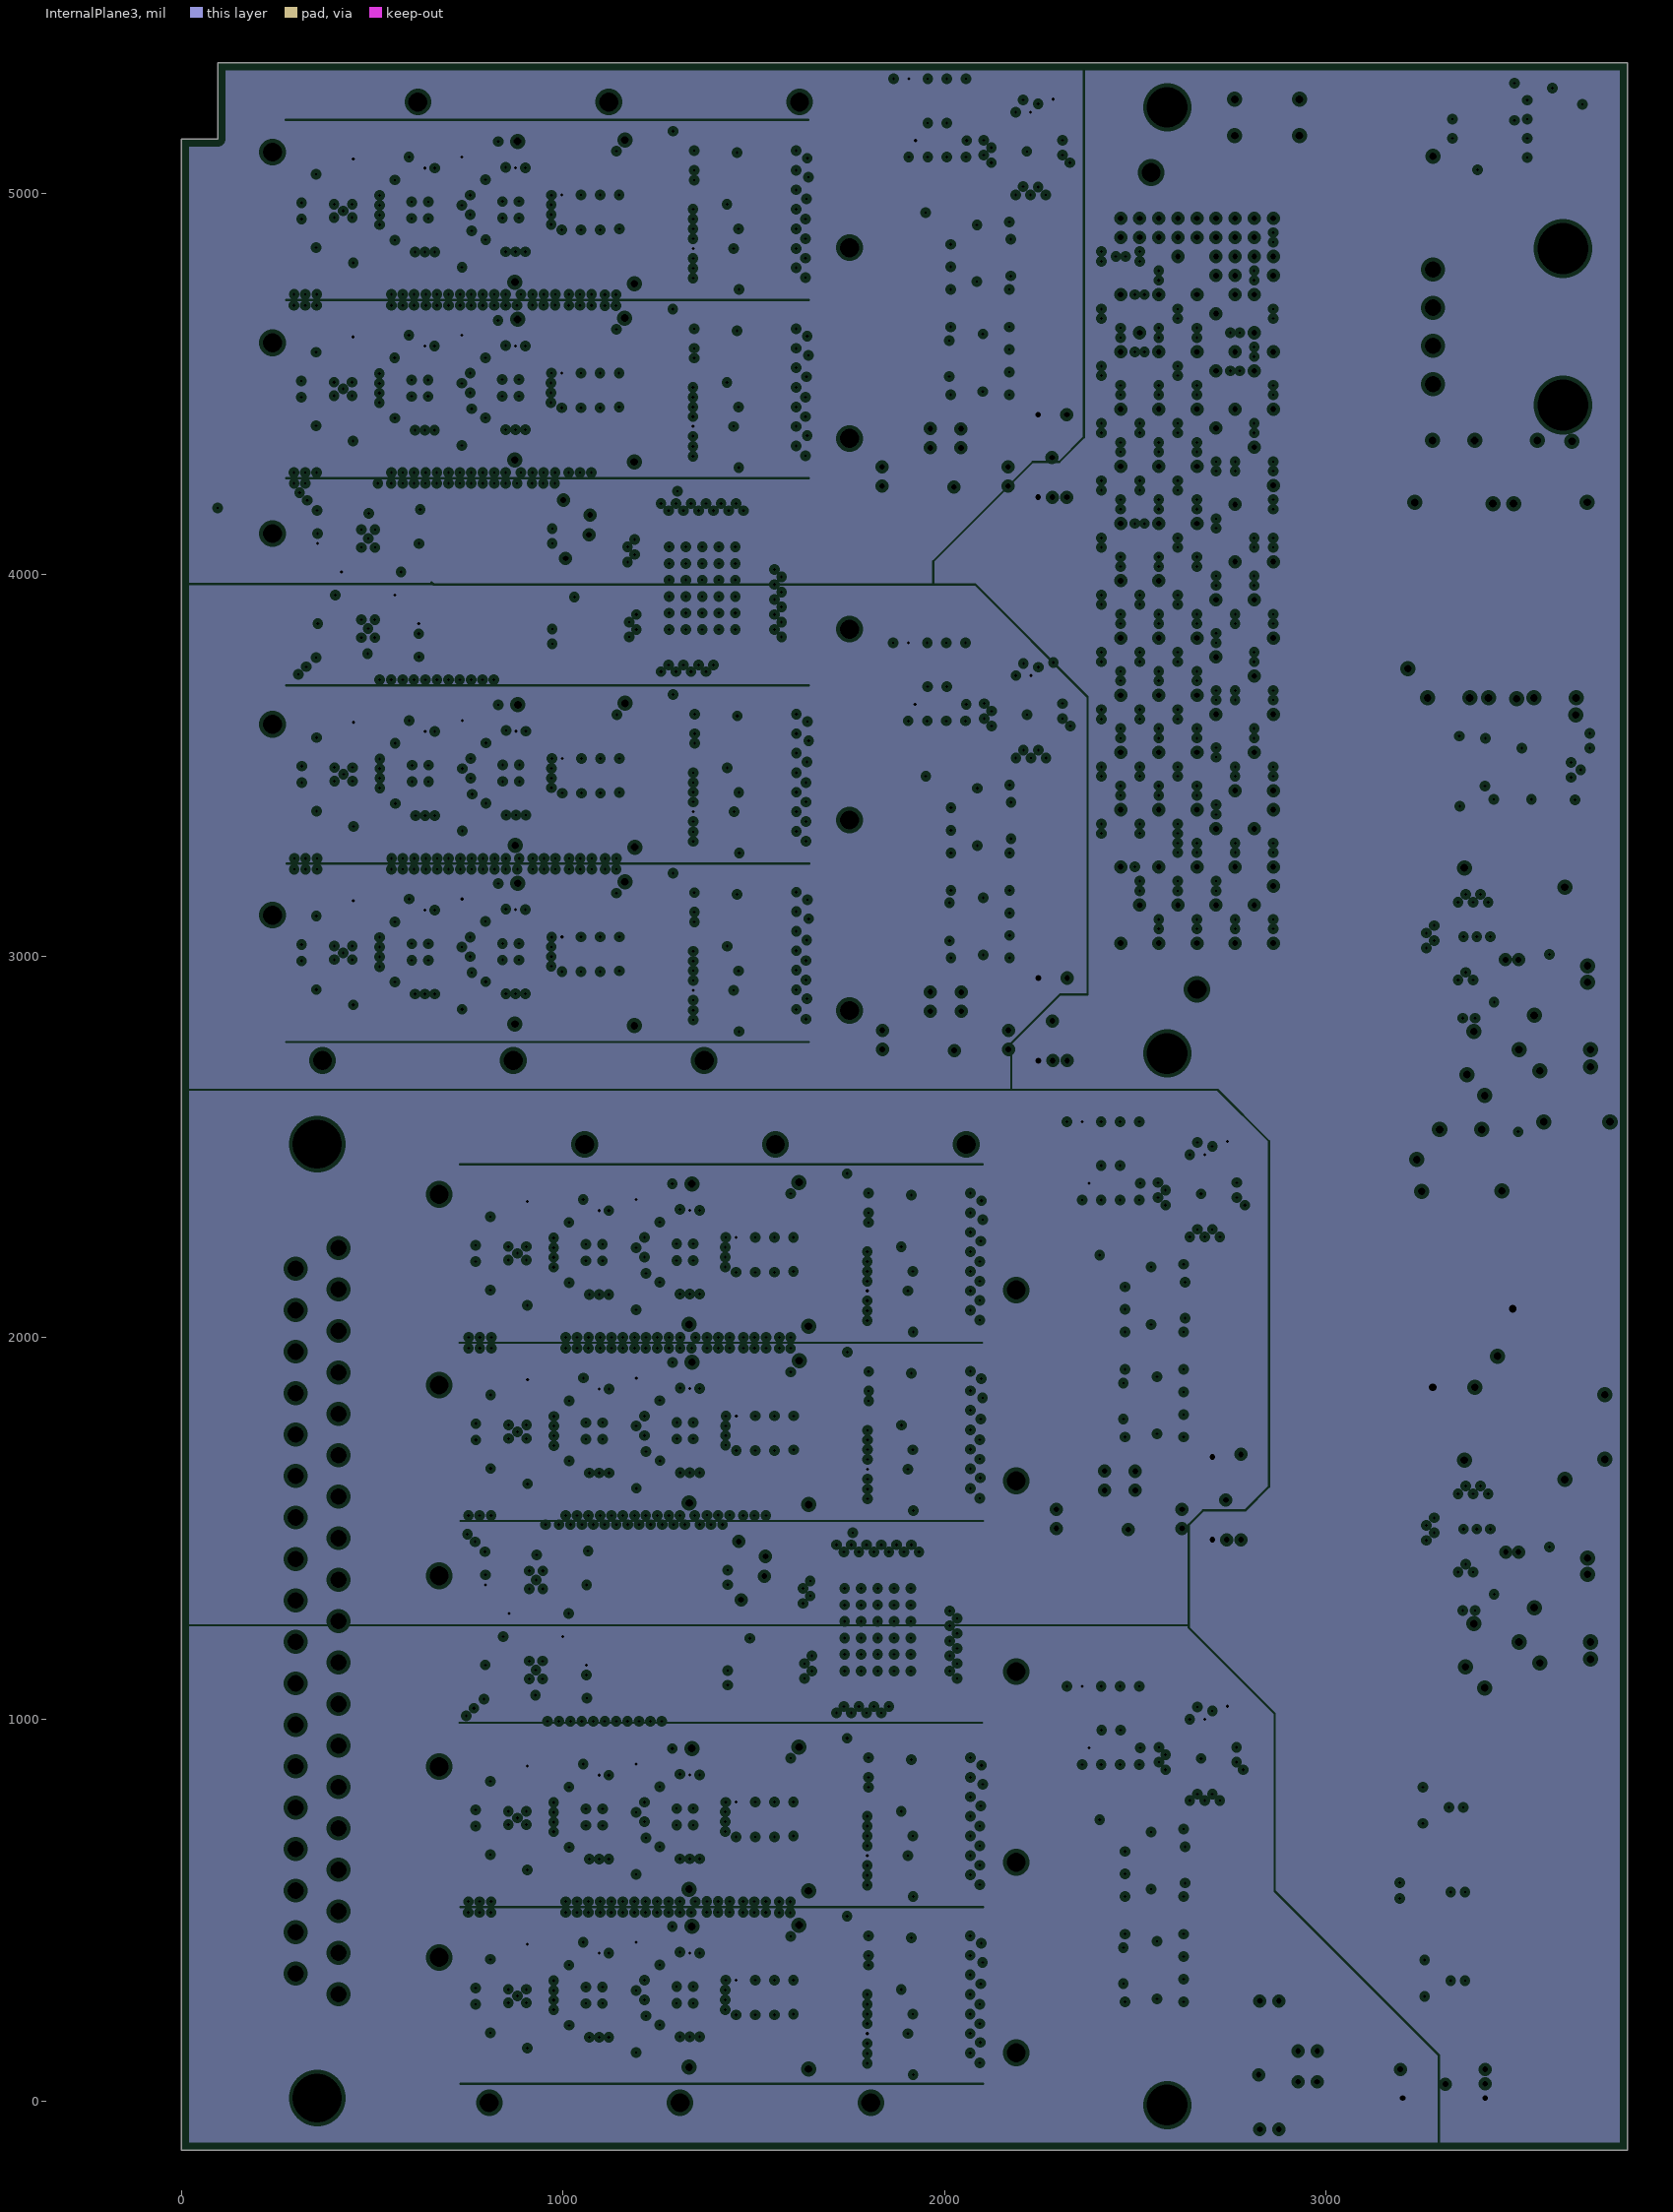
[diagram p7: InternalPlane3, clearances drawn from the general rule]
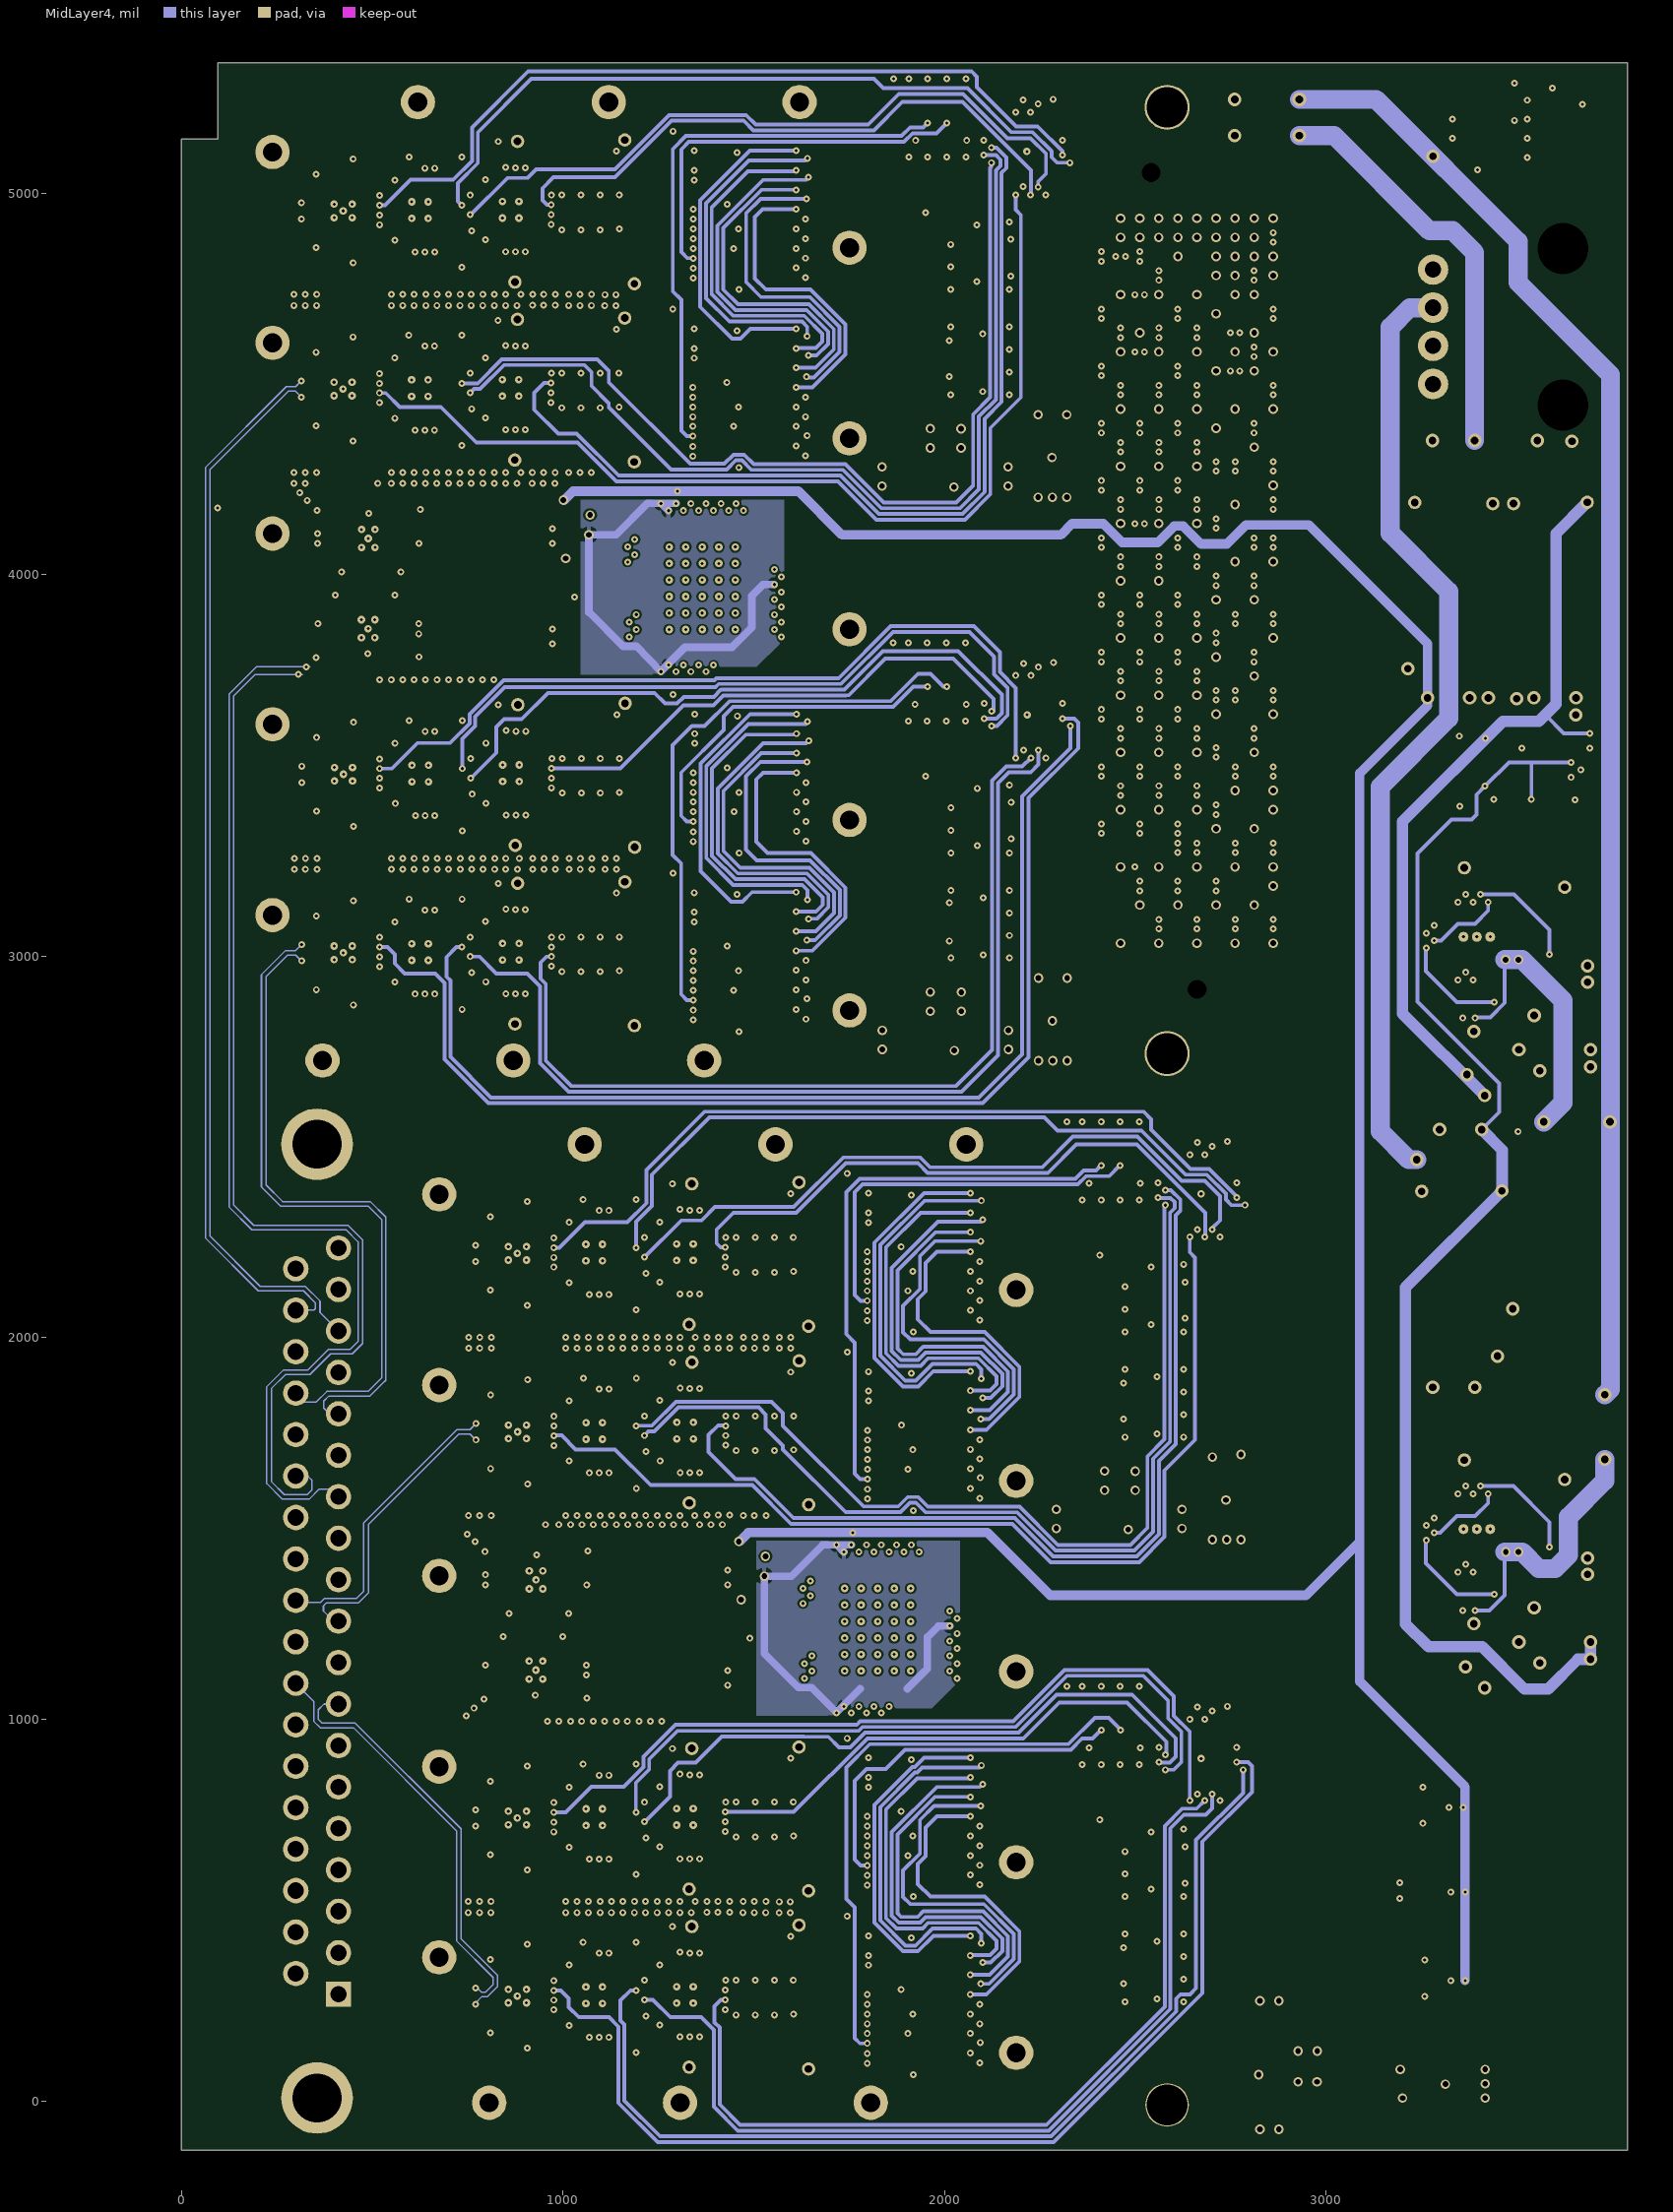
[diagram p8: MidLayer4]
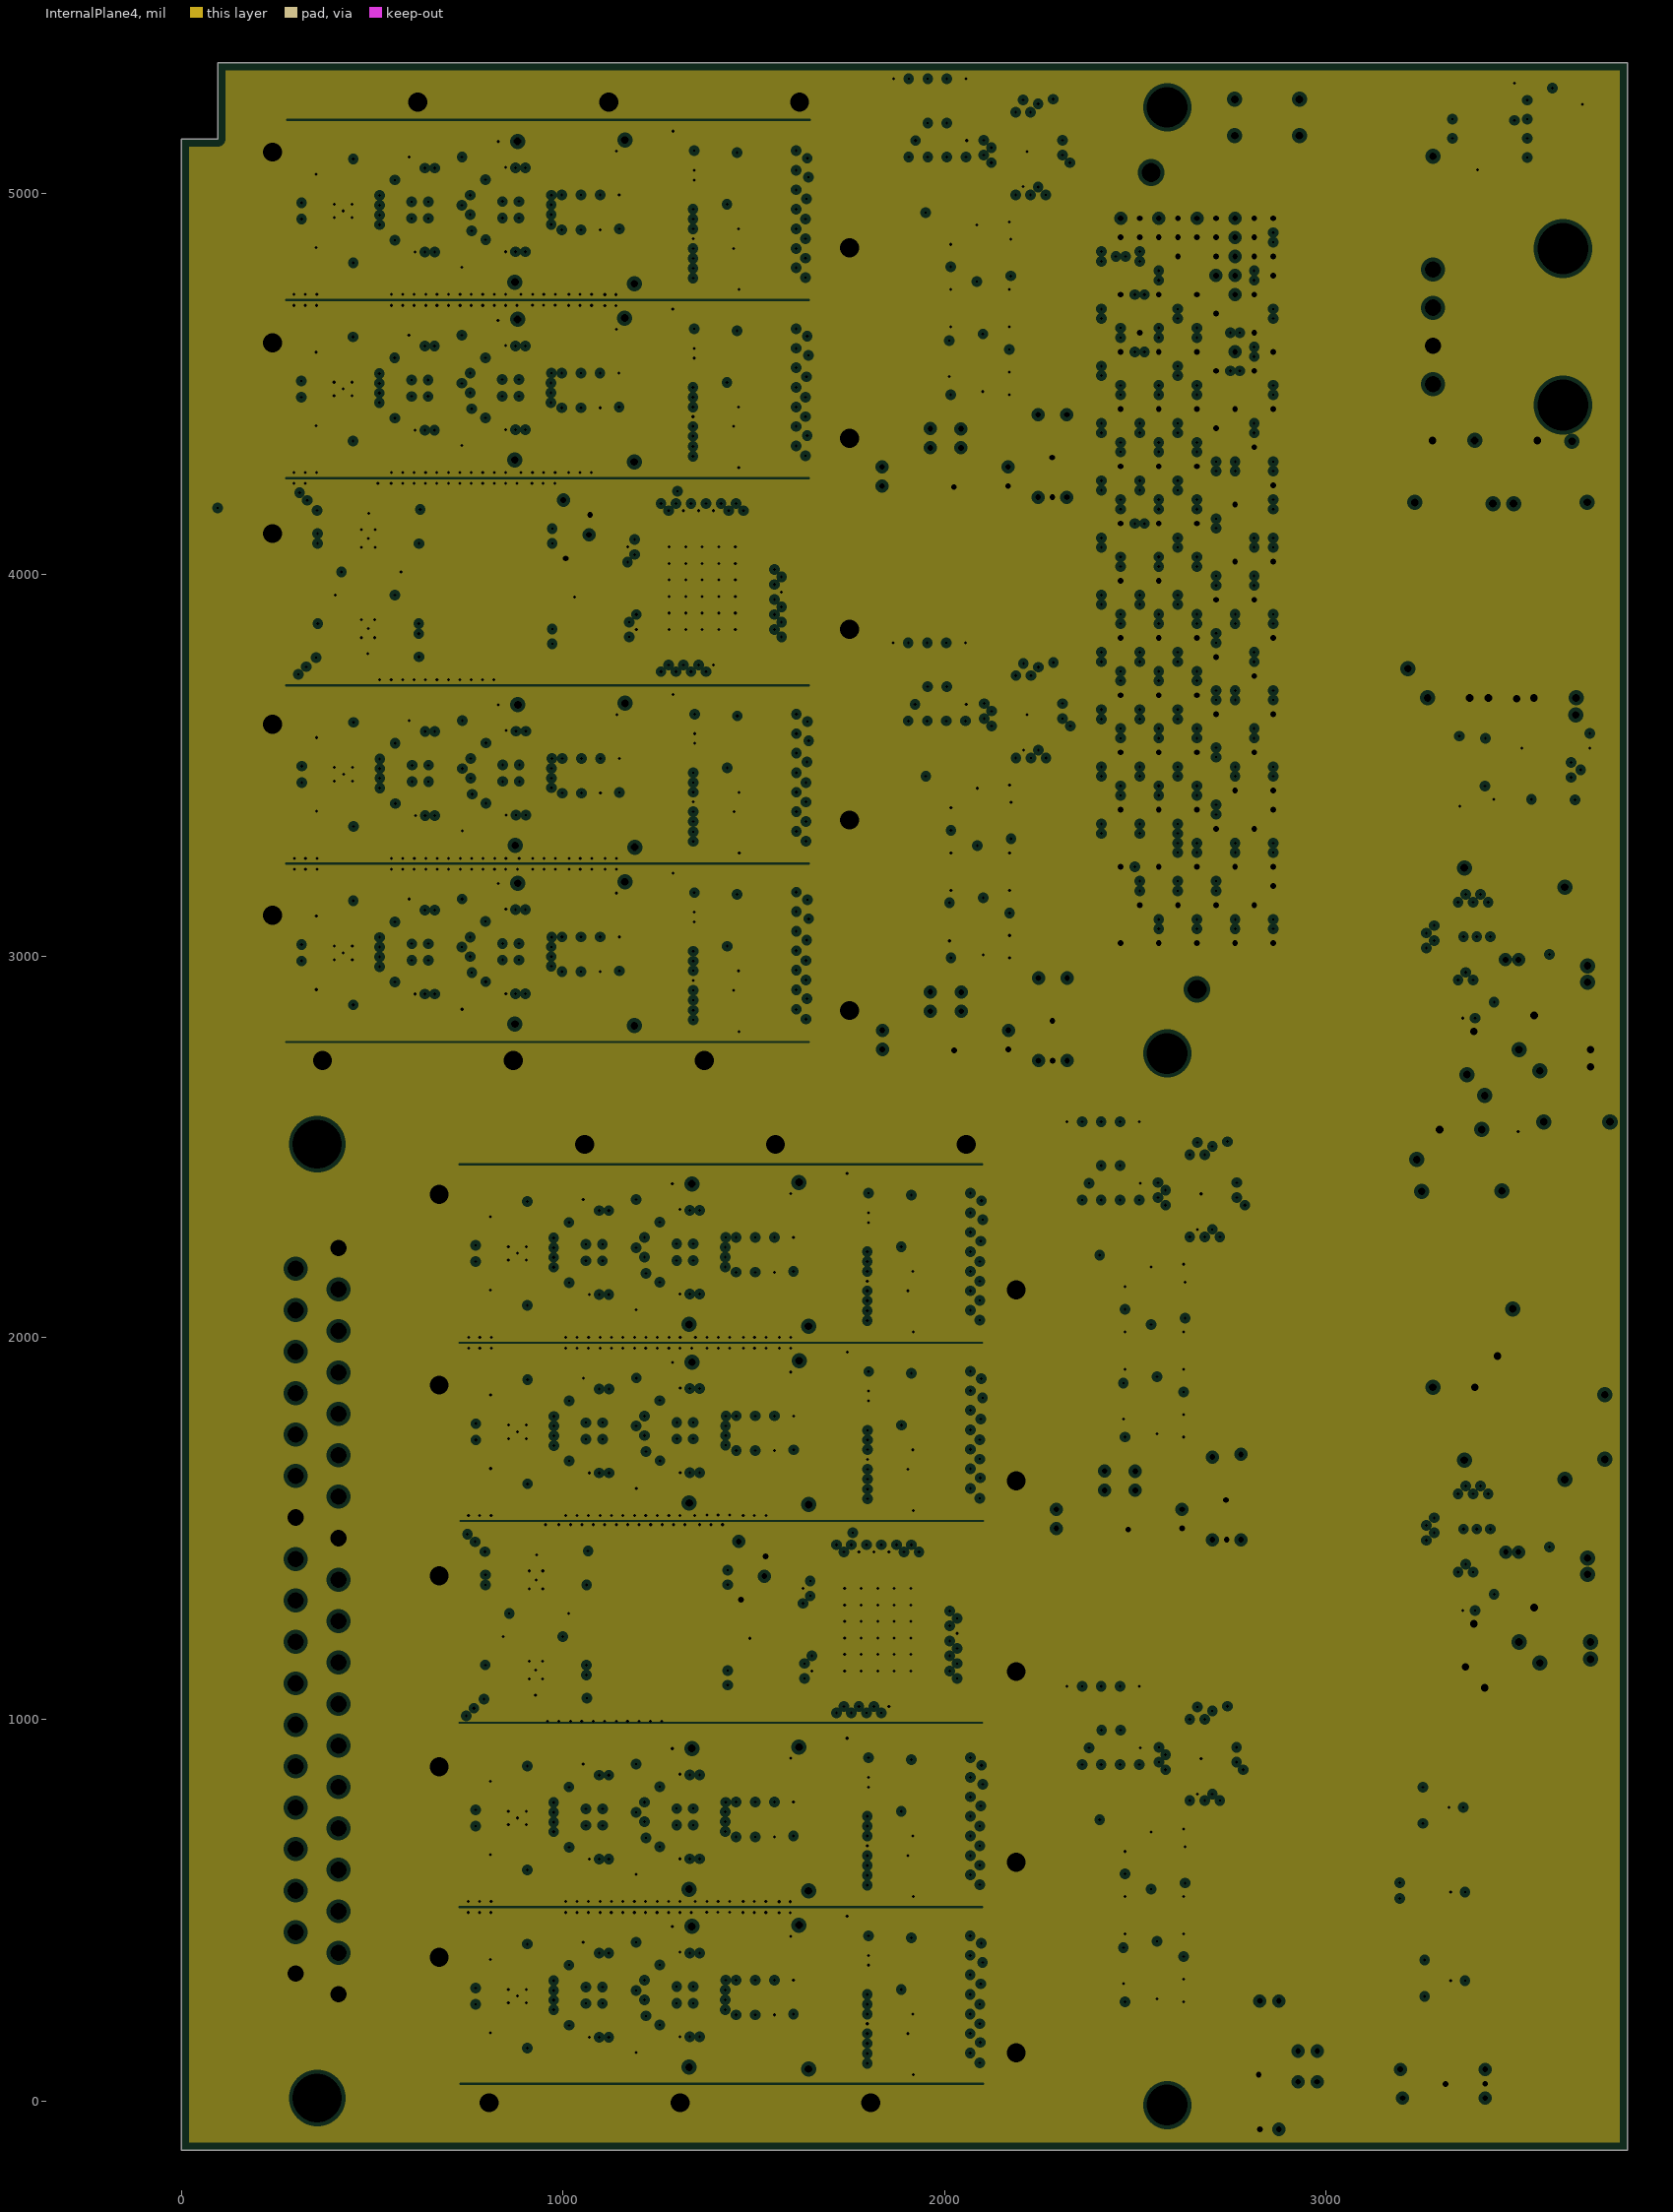
[diagram p9: InternalPlane4, clearances drawn from the general rule]

## Layer stack, top to bottom
TopLayer: signal copper 0.7
Dielectric: core 4.15, FR-4, Dk 4.8
InternalPlane1: plane copper 0.7, net GND
Dielectric: prepreg 6, FR-4, Dk 4.8
MidLayer1: signal copper 0.7
Dielectric: core 5.83, FR-4, Dk 4.8
InternalPlane2: plane copper 0.7, net (Multiple Nets)
Dielectric: prepreg 6, FR-4, Dk 4.8
MidLayer2: signal copper 1.4
Dielectric: core 4.72, FR-4, Dk 4.8
MidLayer3: signal copper 0.7
Dielectric: prepreg 6, FR-4, Dk 4.8
InternalPlane3: plane copper 0.7, net (Multiple Nets)
Dielectric: core 5.83, FR-4, Dk 4.8
MidLayer4: signal copper 1.4
Dielectric: prepreg 6, FR-4, Dk 4.8
InternalPlane4: plane copper 0.7, net GND
Dielectric: core 4.15, FR-4, Dk 4.8
BottomLayer: signal copper 0.7

## Board outline
0,-129.92 0,5142 96,5142 96,5342.52 3790,5342.52 3790,-129.92 1066.93,-129.92

## Design rules (kind name [scope] priority, off if disabled: settings)
Clearance [All] p1: gap=5
ComponentClearance [All] p1 off: gap=0 collisioncheckmode=3 verticalgap=10 showdistances=FALSE
DiffPairsRouting [All] p1: maxlimit=8 minlimit=6.5 mostfreqgap=7 toplayer_maxgap=6.5 toplayer_prefgap=6.5 midlayer1_mingap=8 midlayer1_prefgap=8 midlayer2_mingap=7 midlayer2_maxgap=7 midlayer3_mingap=7 midlayer3_maxgap=7 midlayer4_mingap=8 midlayer4_prefgap=8 bottomlayer_maxgap=6.5 bottomlayer_prefgap=6.5 maxuncoupledlength=500
FabricationTestPointUsage TestPointUsage [All] p1: valid=0 allowmultiple=FALSE
FabricationTestpoint Testpoint [All] p1: side=3 testpointundercomponent=TRUE minsize=40 maxsize=100 preferedsize=60 minholesize=20 maxholesize=40 preferedholesize=32 testpointgrid=1 allowsidetop=TRUE allowsidebottom=TRUE usegrid=TRUE gridtolerance=0.01
Height "FMC, Page 24 Component Area Bottom,\"Max Height\"" [TouchesRoom('Component Aera Bottom')] p1: minheight=0 maxheight=39.37 prefheight=39.37
Height "FMC, Page 24 Component Area Top,\"Max Height\"" [TouchesRoom('Component Aera Top')] p2: minheight=0 maxheight=185.04 prefheight=185.04
Height "FMC, Page 24 I/O area,\"Max Height\"" [TouchesRoom('I/O Aera 1') and   TouchesRoom('I/O Aera 2')] p3: minheight=0 maxheight=374.02 prefheight=374.02
MinimumSolderMaskSliver [All] p1: minsoldermaskwidth=3.5
PlaneClearance [All] p1: clearance=10
PlaneConnect [All] p1: planeconnectstyle=Relief reliefexpansion=5 reliefentries=4 reliefconductorwidth=5 reliefairgap=5
PolygonConnect [All] p1: connectstyle=Relief reliefconductorwidth=10 reliefentries=4 polygonreliefangle="90 Angle" airgapwidth=10
RoomDefinition PR8 [InComponentClass('PR8')] p1: confinementstyle=ConfineIn formatcopy=TRUE lockcomponents=FALSE outline 944.93,596.65 944.93,662.02 945.56,662.02 945.56,887.39 1043.11,887.39 1043.11,925.34 1182.11,925.34 1182.11,927.34 1358.93,927.34 1358.93,957.39 1424.3,957.39 1424.3,857.68 1428.04,857.68 1428.04,614.26 1424.3,614.26 1424.3,522.28 1358.93,522.28 1358.93,550.34 1050.11,550.34 1050.11,596.65
RoomDefinition BP [InComponentClass('BP')] p2: confinementstyle=ConfineIn formatcopy=TRUE lockcomponents=FALSE outline 3236.99,1086.99 3780.99,1086.99 3780.99,1854.99 3236.99,1854.99
RoomDefinition BN [InComponentClass('BN')] p3: confinementstyle=ConfineIn formatcopy=TRUE lockcomponents=FALSE outline 3236.99,2514.99 3736.99,2514.99 3736.99,3349.99 3236.99,3349.99
RoomDefinition U_FMCio_rowsCDGH [InComponentClass('U_FMCio_rowsCDGH')] p4: confinementstyle=ConfineIn formatcopy=TRUE lockcomponents=FALSE outline 3049.99,4854.99 3673.99,4854.99 3673.99,5292.99 3049.99,5292.99
RoomDefinition MGMEZZ04 [InComponentClass('MGMEZZ04')] p5: confinementstyle=ConfineIn formatcopy=TRUE lockcomponents=FALSE outline -270.01,-126.01 3423.99,-126.01 3423.99,2820.99 -270.01,2820.99
RoomDefinition DACNulCarA1 [InComponentClass('DACNulCarA1')] p6: confinementstyle=ConfineIn formatcopy=TRUE lockcomponents=FALSE outline 1831.99,4178.99 2361.99,4178.99 2361.99,5309.99 1831.99,5309.99
RoomDefinition PR7 [InComponentClass('PR7')] p7: confinementstyle=ConfineIn formatcopy=TRUE lockcomponents=FALSE outline 944.93,133.94 944.93,199.31 945.56,199.31 945.56,424.68 1043.11,424.68 1043.11,462.63 1182.11,462.63 1182.11,464.63 1358.93,464.63 1358.93,494.68 1424.3,494.68 1424.3,394.98 1428.04,394.98 1428.04,151.55 1424.3,151.55 1424.3,59.57 1358.93,59.57 1358.93,87.63 1050.11,87.63 1050.11,133.94
RoomDefinition PR6 [InComponentClass('PR6')] p8: confinementstyle=ConfineIn formatcopy=TRUE lockcomponents=FALSE outline 945.32,1608.94 945.32,1674.31 945.94,1674.31 945.94,1899.68 1043.5,1899.68 1043.5,1937.63 1182.5,1937.63 1182.5,1939.63 1359.32,1939.63 1359.32,1969.68 1424.68,1969.68 1424.68,1869.98 1428.43,1869.98 1428.43,1626.55 1424.68,1626.55 1424.68,1534.57 1359.32,1534.57 1359.32,1562.63 1050.5,1562.63 1050.5,1608.94
RoomDefinition PR5 [InComponentClass('PR5')] p9: confinementstyle=ConfineIn formatcopy=TRUE lockcomponents=FALSE outline 944.93,2076.65 944.93,2142.02 945.56,2142.02 945.56,2367.39 1043.11,2367.39 1043.11,2405.34 1182.11,2405.34 1182.11,2407.34 1358.93,2407.34 1358.93,2437.39 1424.3,2437.39 1424.3,2337.68 1428.04,2337.68 1428.04,2094.26 1424.3,2094.26 1424.3,2002.28 1358.93,2002.28 1358.93,2030.34 1050.11,2030.34 1050.11,2076.65
RoomDefinition N4 [InComponentClass('N4')] p10: confinementstyle=ConfineIn formatcopy=FALSE lockcomponents=FALSE outline 737.99,502.99 2062.99,502.99 2062.99,979.99 737.99,979.99
RoomDefinition N3 [InComponentClass('N3')] p11: confinementstyle=ConfineIn formatcopy=FALSE lockcomponents=FALSE outline 737.99,1514.99 2063.99,1514.99 2063.99,1991.99 737.99,1991.99
RoomDefinition C4 [InComponentClass('C4')] p12: confinementstyle=ConfineIn formatcopy=FALSE lockcomponents=FALSE outline 737.99,39.99 2062.99,39.99 2062.99,516.99 737.99,516.99
RoomDefinition C3 [InComponentClass('C3')] p13: confinementstyle=ConfineIn formatcopy=FALSE lockcomponents=FALSE outline 737.99,1982.99 2062.99,1982.99 2062.99,2459.99 737.99,2459.99
RoomDefinition Tr13 [InComponentClass('Tr13')] p14: confinementstyle=ConfineIn formatcopy=TRUE lockcomponents=FALSE outline 2119.82,2187.01 2119.82,2398.05 2242.25,2398.05 2242.25,2228.28 2738.39,2228.28 2738.39,1692.53 2360.06,1692.53 2360.06,1727.33 2198.38,1727.33 2198.38,2187.01
RoomDefinition Tr14 [InComponentClass('Tr14')] p15: confinementstyle=ConfineIn formatcopy=TRUE lockcomponents=FALSE outline 2113.32,707.01 2113.32,918.05 2235.74,918.05 2235.74,748.28 2738.39,748.28 2738.39,212.53 2360.06,212.53 2360.06,247.33 2198.38,247.33 2198.38,707.01
RoomDefinition Tr11 [InComponentClass('Tr11')] p16: confinementstyle=ConfineIn formatcopy=TRUE lockcomponents=FALSE outline 1663.32,4919.32 1663.32,5130.36 1785.74,5130.36 1785.74,4960.59 2281.88,4960.59 2281.88,4424.84 1903.55,4424.84 1903.55,4459.64 1741.87,4459.64 1741.87,4919.32
RoomDefinition Tr12 [InComponentClass('Tr12')] p17: confinementstyle=ConfineIn formatcopy=TRUE lockcomponents=FALSE outline 1664.13,3442.66 1664.13,3653.7 1786.56,3653.7 1786.56,3483.93 2282.7,3483.93 2282.7,2948.18 1904.37,2948.18 1904.37,2982.98 1742.69,2982.98 1742.69,3442.66
RoomDefinition DemodAB2 [InComponentClass('DemodAB2')] p18: confinementstyle=ConfineIn formatcopy=TRUE lockcomponents=FALSE outline 730.99,981.99 2090.99,981.99 2090.99,1523.99 730.99,1523.99
RoomDefinition DemodAB1 [InComponentClass('DemodAB1')] p19: selectionmemoryflags=1 confinementstyle=ConfineIn formatcopy=TRUE lockcomponents=FALSE outline 290.99,3711.99 1631.99,3711.99 1631.99,4252.99 290.99,4252.99
RoomDefinition PR4 [InComponentClass('PR4')] p20: selectionmemoryflags=1 confinementstyle=ConfineIn formatcopy=TRUE lockcomponents=FALSE outline 489.24,3332.3 489.24,3397.67 489.87,3397.67 489.87,3623.04 587.42,3623.04 587.42,3660.99 726.42,3660.99 726.42,3662.99 903.24,3662.99 903.24,3693.04 968.61,3693.04 968.61,3593.33 972.35,3593.33 972.35,3349.91 968.61,3349.91 968.61,3257.93 903.24,3257.93 903.24,3285.99 594.42,3285.99 594.42,3332.3
RoomDefinition PR3 [InComponentClass('PR3')] p21: selectionmemoryflags=1 confinementstyle=ConfineIn formatcopy=TRUE lockcomponents=FALSE outline 488.63,2864.33 488.63,2929.7 489.25,2929.7 489.25,3155.07 586.81,3155.07 586.81,3193.02 725.81,3193.02 725.81,3195.02 902.63,3195.02 902.63,3225.07 968,3225.07 968,3125.36 971.74,3125.36 971.74,2881.94 968,2881.94 968,2789.96 902.63,2789.96 902.63,2818.02 593.81,2818.02 593.81,2864.33
RoomDefinition PR2 [InComponentClass('PR2')] p22: selectionmemoryflags=1 confinementstyle=ConfineIn formatcopy=TRUE lockcomponents=FALSE outline 488.18,4342.3 488.18,4407.67 488.81,4407.67 488.81,4633.04 586.36,4633.04 586.36,4670.99 725.36,4670.99 725.36,4672.99 902.18,4672.99 902.18,4703.04 967.55,4703.04 967.55,4603.33 971.29,4603.33 971.29,4359.91 967.55,4359.91 967.55,4267.93 902.18,4267.93 902.18,4295.99 593.36,4295.99 593.36,4342.3
RoomDefinition PR1 [InComponentClass('PR1')] p23: selectionmemoryflags=1 confinementstyle=ConfineIn formatcopy=TRUE lockcomponents=FALSE outline 488.42,4808.96 488.42,4874.33 489.05,4874.33 489.05,5099.7 586.61,5099.7 586.61,5137.65 725.61,5137.65 725.61,5139.65 902.42,5139.65 902.42,5169.7 967.79,5169.7 967.79,5069.99 971.53,5069.99 971.53,4826.57 967.79,4826.57 967.79,4734.59 902.42,4734.59 902.42,4762.65 593.61,4762.65 593.61,4808.96
RoomDefinition N2 [InComponentClass('N2')] p24: selectionmemoryflags=1 confinementstyle=ConfineIn formatcopy=TRUE lockcomponents=FALSE outline 281.99,3237.99 1606.99,3237.99 1606.99,3715.99 281.99,3715.99
RoomDefinition N1 [InComponentClass('N1')] p25: selectionmemoryflags=1 confinementstyle=ConfineIn formatcopy=FALSE lockcomponents=FALSE outline 280.99,4247.99 1605.99,4247.99 1605.99,4725.99 280.99,4725.99
RoomDefinition DACNulCarB2 [InComponentClass('DACNulCarB2')] p26: confinementstyle=ConfineIn formatcopy=TRUE lockcomponents=FALSE outline 2287.99,-93.01 3419.99,-93.01 3419.99,1095.99 2287.99,1095.99
RoomDefinition DACNulCarB1 [InComponentClass('DACNulCarB1')] p27: confinementstyle=ConfineIn formatcopy=TRUE lockcomponents=FALSE outline 1831.99,2701.99 2362.99,2701.99 2362.99,3831.99 1831.99,3831.99
RoomDefinition DACNulCarA2 [InComponentClass('DACNulCarA2')] p28: confinementstyle=ConfineIn formatcopy=TRUE lockcomponents=FALSE outline 2287.99,1446.99 2818.99,1446.99 2818.99,2575.99 2287.99,2575.99
RoomDefinition C2 [InComponentClass('C2')] p29: selectionmemoryflags=1 confinementstyle=ConfineIn formatcopy=FALSE lockcomponents=FALSE outline 281.99,2769.99 1606.99,2769.99 1606.99,3247.99 281.99,3247.99
RoomDefinition C1 [InComponentClass('C1')] p30: selectionmemoryflags=1 confinementstyle=ConfineIn formatcopy=FALSE lockcomponents=FALSE outline 281.99,4714.99 1606.99,4714.99 1606.99,5191.99 281.99,5191.99
RoutingVias [All] p1: holewidth=8 width=18 viastyle="Through Hole" minholewidth=8 minwidth=18 maxholewidth=28 maxwidth=50
ShortCircuit [All] p1 off: allowed=FALSE
SilkToSolderMaskClearance SilkscreenOverComponentPads [IsPad] p1: minsilkscreentomaskgap=10 clearancetoexposedcopper=TRUE
SolderMaskExpansion [All] p1: expansion=2
Width DiffPairWidths [(InDifferentialPairClass('All Differential Pairs'))] p1: maxlimit=6.5 minlimit=4 preferedwidth=5 toplayer_minwidth=4.5 toplayer_prefwidth=4.5 midlayer1_maxwidth=4 midlayer1_prefwidth=4 midlayer2_minwidth=5 midlayer2_maxwidth=5 midlayer3_minwidth=5 midlayer3_maxwidth=5 midlayer4_maxwidth=4 midlayer4_prefwidth=4 bottomlayer_minwidth=4.5 bottomlayer_prefwidth=4.5 minimp=50.000000 maximp=50.000000 favimp=50.000000
Width [All] p2: maxlimit=100 minlimit=4 preferedwidth=10 midlayer1_maxwidth=50 midlayer2_maxwidth=50 midlayer3_maxwidth=50 midlayer4_maxwidth=50 minimp=50.000000 maximp=50.000000 favimp=50.000000
18 further rules are at their usual default settings.

## Classes and differential pairs
component class U_FMCio_rowsCDGH: C99 R21 R25 R31 R32 U15
component class M1: Shield1 Shield2
component class MGMEZZ04: C58 C60 C63 J2 R55 R56 U13 U16 U20
component class C1: AmpN1A AmpP1A C36A C37A C38A C39A C40A C41A C42A C43A C44A C45A C46A C47A C48A C49A C50A C80A C83A C96A C97A C98A IoutA1A IoutB1A R18A R19A R20A R22A R23A R24A R26A R29A R30A R33A R34A R35A U5A U6A U7A
component class C2: AmpN1C AmpP1C C36C C37C C38C C39C C40C C41C C42C C43C C44C C45C C46C C47C C48C C49C C50C C80C C83C C96C C97C C98C IoutA1C IoutB1C R18C R19C R20C R22C R23C R24C R26C R29C R30C R33C R34C R35C U5C U6C U7C
component class C3: AmpN1E AmpP1E C36E C37E C38E C39E C40E C41E C42E C43E C44E C45E C46E C47E C48E C49E C50E C80E C83E C96E C97E C98E IoutA1E IoutB1E R18E R19E R20E R22E R23E R24E R26E R29E R30E R33E R34E R35E U5E U6E U7E
component class C4: AmpN1G AmpP1G C36G C37G C38G C39G C40G C41G C42G C43G C44G C45G C46G C47G C48G C49G C50G C80G C83G C96G C97G C98G IoutA1G IoutB1G R18G R19G R20G R22G R23G R24G R26G R29G R30G R33G R34G R35G U5G U6G U7G
component class DACNulCarA1: C51A C52A C53A C55A C77A C102A C110A R27A R28A R37A R38A R39A R40A R41A R42A R43A R44A R45A R46A R47A U8A U9A U10A U11A
component class DACNulCarA2: C51C C52C C53C C55C C77C C102C C110C R27C R28C R37C R38C R39C R40C R41C R42C R43C R44C R45C R46C R47C U8C U9C U10C U11C
component class DACNulCarB1: C51B C52B C53B C55B C77B C102B C110B R27B R28B R37B R38B R39B R40B R41B R42B R43B R44B R45B R46B R47B U8B U9B U10B U11B
component class DACNulCarB2: C51D C52D C53D C55D C77D C102D C110D R27D R28D R37D R38D R39D R40D R41D R42D R43D R44D R45D R46D R47D U8D U9D U10D U11D
component class DemodAB1: C1A C2A C3A C4A C5A C6A C7A C8A C9A C10A C11A C12A C13A C14A C15A C16A C17A C18A C19A C20A C21A C22A C23A C24A C25A C26A C27A C28A C29A C30A C31A C32A C33A C34A C35A L1A L2A L3A L4A L5A L6A L7A L8A R1A R2A R3A R4A R5A R6A R7A R8A R9A R10A R11A R12A R13A R14A R15A R16A R17A U1A U2A U3A U4A
component class DemodAB2: C1B C2B C3B C4B C5B C6B C7B C8B C9B C10B C11B C12B C13B C14B C15B C16B C17B C18B C19B C20B C21B C22B C23B C24B C25B C26B C27B C28B C29B C30B C31B C32B C33B C34B C35B L1B L2B L3B L4B L5B L6B L7B L8B R1B R2B R3B R4B R5B R6B R7B R8B R9B R10B R11B R12B R13B R14B R15B R16B R17B U1B U2B U3B U4B
component class N1: AmpN1B AmpP1B C36B C37B C38B C39B C40B C41B C42B C43B C44B C45B C46B C47B C48B C49B C50B C80B C83B C96B C97B C98B IoutA1B IoutB1B R18B R19B R20B R22B R23B R24B R26B R29B R30B R33B R34B R35B U5B U6B U7B
component class N2: AmpN1D AmpP1D C36D C37D C38D C39D C40D C41D C42D C43D C44D C45D C46D C47D C48D C49D C50D C80D C83D C96D C97D C98D IoutA1D IoutB1D R18D R19D R20D R22D R23D R24D R26D R29D R30D R33D R34D R35D U5D U6D U7D
component class N3: AmpN1F AmpP1F C36F C37F C38F C39F C40F C41F C42F C43F C44F C45F C46F C47F C48F C49F C50F C80F C83F C96F C97F C98F IoutA1F IoutB1F R18F R19F R20F R22F R23F R24F R26F R29F R30F R33F R34F R35F U5F U6F U7F
component class N4: AmpN1H AmpP1H C36H C37H C38H C39H C40H C41H C42H C43H C44H C45H C46H C47H C48H C49H C50H C80H C83H C96H C97H C98H IoutA1H IoutB1H R18H R19H R20H R22H R23H R24H R26H R29H R30H R33H R34H R35H U5H U6H U7H
component class PR1: C88A C89A C90A C91A C92A C93A C94A C95A R95A R96A R97A R98A R99A R100A R101A R102A R103A R104A U18A U19A
component class PR2: C88B C89B C90B C91B C92B C93B C94B C95B R95B R96B R97B R98B R99B R100B R101B R102B R103B R104B U18B U19B
component class PR3: C88C C89C C90C C91C C92C C93C C94C C95C R95C R96C R97C R98C R99C R100C R101C R102C R103C R104C U18C U19C
component class PR4: C88D C89D C90D C91D C92D C93D C94D C95D R95D R96D R97D R98D R99D R100D R101D R102D R103D R104D U18D U19D
component class PR5: C88E C89E C90E C91E C92E C93E C94E C95E R95E R96E R97E R98E R99E R100E R101E R102E R103E R104E U18E U19E
component class PR6: C88F C89F C90F C91F C92F C93F C94F C95F R95F R96F R97F R98F R99F R100F R101F R102F R103F R104F U18F U19F
component class PR7: C88G C89G C90G C91G C92G C93G C94G C95G R95G R96G R97G R98G R99G R100G R101G R102G R103G R104G U18G U19G
component class PR8: C88H C89H C90H C91H C92H C93H C94H C95H R95H R96H R97H R98H R99H R100H R101H R102H R103H R104H U18H U19H
component class Tr11: C84A C85A C86A C87A C114A C115A C116A C117A RT1A RT2A U17A
component class Tr12: C84B C85B C86B C87B C114B C115B C116B C117B RT1B RT2B U17B
component class Tr13: C84C C85C C86C C87C C114C C115C C116C C117C RT1C RT2C U17C
component class Tr14: C84D C85D C86D C87D C114D C115D C116D C117D RT1D RT2D U17D
component class U_FMCPower: C54 C72 C73 C78 C79 C81 C82 C100 C101 C104 DP1 In1 In2 Ip1 Ip2 Ip3 Ip4 L9 L12 L13 P1 P2 R48 R52 R62 R68 R70 R71 R73 R74 R75 R76 R77 R78 U14
channel class ADC: DemodAB1 DemodAB2
channel class DAC: C1 C2 C3 C4 N1 N2 N3 N4
channel class LvlTranslate: Tr11 Tr12 Tr13 Tr14 Tr15 Tr16 Tr17 Tr18
channel class NullerCarrier: DACNulCarA1 DACNulCarA2 DACNulCarB1 DACNulCarB2
channel class ProgramableResistor: PR1 PR2 PR3 PR4 PR5 PR6 PR7 PR8
channel class TwoWires: W12 W34
component class BN: BuckSyncA C56A C57A C59A C61A C62A C65A C66A C67A C68A C69A L10A R49A R50A R51A R53A R54A R57A R58A R59A R61A R63A R65A Rfb1A Rfb3A TMON2A U12A
component class BP: BuckSyncB C56B C57B C59B C61B C62B C65B C66B C67B C68B C69B L10B R49B R50B R51B R53B R54B R57B R58B R59B R61B R63B R65B Rfb1B Rfb3B TMON2B U12B
channel class BuckReg: U_Regulators1 U_Regulators2
net class CH1_DAC_DAT[0..15]: CH1_DAC_DAT0 CH1_DAC_DAT1 CH1_DAC_DAT2 CH1_DAC_DAT3 CH1_DAC_DAT4 CH1_DAC_DAT5 CH1_DAC_DAT6 CH1_DAC_DAT7 CH1_DAC_DAT8 CH1_DAC_DAT9 CH1_DAC_DAT10 CH1_DAC_DAT11 CH1_DAC_DAT12 CH1_DAC_DAT13 CH1_DAC_DAT14 CH1_DAC_DAT15
net class CH2_DAC_DAT[0..15]: CH2_DAC_DAT0 CH2_DAC_DAT1 CH2_DAC_DAT2 CH2_DAC_DAT3 CH2_DAC_DAT4 CH2_DAC_DAT5 CH2_DAC_DAT6 CH2_DAC_DAT7 CH2_DAC_DAT8 CH2_DAC_DAT9 CH2_DAC_DAT10 CH2_DAC_DAT11 CH2_DAC_DAT12 CH2_DAC_DAT13 CH2_DAC_DAT14 CH2_DAC_DAT15
net class CH3_DAC_DAT[0..15]: CH3_DAC_DAT0 CH3_DAC_DAT1 CH3_DAC_DAT2 CH3_DAC_DAT3 CH3_DAC_DAT4 CH3_DAC_DAT5 CH3_DAC_DAT6 CH3_DAC_DAT7 CH3_DAC_DAT8 CH3_DAC_DAT9 CH3_DAC_DAT10 CH3_DAC_DAT11 CH3_DAC_DAT12 CH3_DAC_DAT13 CH3_DAC_DAT14 CH3_DAC_DAT15
net class CH4_DAC_DAT[0..15]: CH4_DAC_DAT0 CH4_DAC_DAT1 CH4_DAC_DAT2 CH4_DAC_DAT3 CH4_DAC_DAT4 CH4_DAC_DAT5 CH4_DAC_DAT6 CH4_DAC_DAT7 CH4_DAC_DAT8 CH4_DAC_DAT9 CH4_DAC_DAT10 CH4_DAC_DAT11 CH4_DAC_DAT12 CH4_DAC_DAT13 CH4_DAC_DAT14 CH4_DAC_DAT15
differential pair ADC0_OUT.ADR.ADR: +ADC0_OUT.ADR.ADR_P -ADC0_OUT.ADR.ADR_N
differential pair ADC0_OUT.AH.D0: +ADC0_OUT.AH.D0_P -ADC0_OUT.AH.D0_N
differential pair ADC0_OUT.AH.D1: +ADC0_OUT.AH.D1_P -ADC0_OUT.AH.D1_N
differential pair ADC0_OUT.AH.D2: +ADC0_OUT.AH.D2_P -ADC0_OUT.AH.D2_N
differential pair ADC0_OUT.AH.D3: +ADC0_OUT.AH.D3_P -ADC0_OUT.AH.D3_N
differential pair ADC0_OUT.AH.D4: +ADC0_OUT.AH.D4_P -ADC0_OUT.AH.D4_N
differential pair ADC0_OUT.AH.D5: +ADC0_OUT.AH.D5_P -ADC0_OUT.AH.D5_N
differential pair ADC0_OUT.AH.D6: +ADC0_OUT.AH.D6_P -ADC0_OUT.AH.D6_N
differential pair ADC0_OUT.AH.D7: +ADC0_OUT.AH.D7_P -ADC0_OUT.AH.D7_N
differential pair ADC0_OUT.BDR.BDR: +ADC0_OUT.BDR.BDR_P -ADC0_OUT.BDR.BDR_N
differential pair ADC0_OUT.BH.D0: +ADC0_OUT.BH.D0_P -ADC0_OUT.BH.D0_N
differential pair ADC0_OUT.BH.D1: +ADC0_OUT.BH.D1_P -ADC0_OUT.BH.D1_N
differential pair ADC0_OUT.BH.D2: +ADC0_OUT.BH.D2_P -ADC0_OUT.BH.D2_N
differential pair ADC0_OUT.BH.D3: +ADC0_OUT.BH.D3_P -ADC0_OUT.BH.D3_N
differential pair ADC0_OUT.BH.D4: +ADC0_OUT.BH.D4_P -ADC0_OUT.BH.D4_N
differential pair ADC0_OUT.BH.D5: +ADC0_OUT.BH.D5_P -ADC0_OUT.BH.D5_N
differential pair ADC0_OUT.BH.D6: +ADC0_OUT.BH.D6_P -ADC0_OUT.BH.D6_N
differential pair ADC0_OUT.BH.D7: +ADC0_OUT.BH.D7_P -ADC0_OUT.BH.D7_N
differential pair ADC0_OUT.CDR.CDR: +ADC0_OUT.CDR.CDR_P -ADC0_OUT.CDR.CDR_N
differential pair ADC0_OUT.CH.D2: +ADC0_OUT.CH.D2_P -ADC0_OUT.CH.D2_N
differential pair ADC0_OUT.CH.D3: +ADC0_OUT.CH.D3_P -ADC0_OUT.CH.D3_N
differential pair ADC0_OUT.CH.D4: +ADC0_OUT.CH.D4_P -ADC0_OUT.CH.D4_N
differential pair ADC0_OUT.CH.D5: +ADC0_OUT.CH.D5_P -ADC0_OUT.CH.D5_N
differential pair ADC0_OUT.CH.D6: +ADC0_OUT.CH.D6_P -ADC0_OUT.CH.D6_N
differential pair ADC0_OUT.CH.D7: +ADC0_OUT.CH.D7_P -ADC0_OUT.CH.D7_N
differential pair ADC0_OUT.DDR.DDR: +ADC0_OUT.DDR.DDR_P -ADC0_OUT.DDR.DDR_N
differential pair ADC0_OUT.DH.D3: +ADC0_OUT.DH.D3_P -ADC0_OUT.DH.D3_N
differential pair ADC0_OUT.DH.D4: +ADC0_OUT.DH.D4_P -ADC0_OUT.DH.D4_N
differential pair ADC0_OUT.DH.D5: +ADC0_OUT.DH.D5_P -ADC0_OUT.DH.D5_N
differential pair ADC0_OUT.DH.D6: +ADC0_OUT.DH.D6_P -ADC0_OUT.DH.D6_N
differential pair ADC0_OUT.DH.D7: +ADC0_OUT.DH.D7_P -ADC0_OUT.DH.D7_N
differential pair CARDACCLKA: +CARDACCLKA_P -CARDACCLKA_N
differential pair CARDACCLKB: +CARDACCLKB_P -CARDACCLKB_N
differential pair CARDACCLKC: +CARDACCLKC_P -CARDACCLKC_N
differential pair CARDACCLKD: +CARDACCLKD_P -CARDACCLKD_N
differential pair FMCSYNC: +FMCSYNC_P -FMCSYNC_N
differential pair MGT0_CLK_M2C: +MGT0_CLK_M2C_P -MGT0_CLK_M2C_N
differential pair MGT0_D_C2M: +MGT0_D_C2M_P -MGT0_D_C2M_N
differential pair MGT0_D_M2C: +MGT0_D_M2C_P -MGT0_D_M2C_N
differential pair NULDACCLKA: +NULDACCLKA_P -NULDACCLKA_N
differential pair NULDACCLKB: +NULDACCLKB_P -NULDACCLKB_N
differential pair NULDACCLKC: +NULDACCLKC_P -NULDACCLKC_N
differential pair NULDACCLKD: +NULDACCLKD_P -NULDACCLKD_N
differential pair SCL: +SCL_P -SCL_N
differential pair SDA_MISO: +SDA_MISO_P -SDA_MISO_N
differential pair SDA_MOSI: +SDA_MOSI_P -SDA_MOSI_N
differential pair DACOUTA: +DACOUTA_P -DACOUTA_N
differential pair DACOUTB: +DACOUTB_P -DACOUTB_N
differential pair DACOUTC: +DACOUTC_P -DACOUTC_N
differential pair DACOUTD: +DACOUTD_P -DACOUTD_N
differential pair DACOUTE: +DACOUTE_P -DACOUTE_N
differential pair DACOUTF: +DACOUTF_P -DACOUTF_N
differential pair DACOUTG: +DACOUTG_P -DACOUTG_N
differential pair DACOUTH: +DACOUTH_P -DACOUTH_N
differential pair ADCIN1A: +ADCIN1A_P -ADCIN1A_N
differential pair ADCIN1B: +ADCIN1B_P -ADCIN1B_N
differential pair ADCIN2A: +ADCIN2A_P -ADCIN2A_N
differential pair ADCIN2B: +ADCIN2B_P -ADCIN2B_N
differential pair CH12_ADC_DAT.DATACLOCKOUT: +CH12_ADC_DAT.DATACLOCKOUT_P -CH12_ADC_DAT.DATACLOCKOUT_N
differential pair CH12_ADC_DAT.ENC: +CH12_ADC_DAT.ENC_P -CH12_ADC_DAT.ENC_N
differential pair CH12_ADC_DAT.FRAMESTART: +CH12_ADC_DAT.FRAMESTART_P -CH12_ADC_DAT.FRAMESTART_N
differential pair CH12_ADC_DAT.OUT1A: +CH12_ADC_DAT.OUT1A_P -CH12_ADC_DAT.OUT1A_N
differential pair CH12_ADC_DAT.OUT1B: +CH12_ADC_DAT.OUT1B_P -CH12_ADC_DAT.OUT1B_N
differential pair CH12_ADC_DAT.OUT2A: +CH12_ADC_DAT.OUT2A_P -CH12_ADC_DAT.OUT2A_N
differential pair CH12_ADC_DAT.OUT2B: +CH12_ADC_DAT.OUT2B_P -CH12_ADC_DAT.OUT2B_N
differential pair CH34_ADC_DAT.DATACLOCKOUT: +CH34_ADC_DAT.DATACLOCKOUT_P -CH34_ADC_DAT.DATACLOCKOUT_N
differential pair CH34_ADC_DAT.ENC: +CH34_ADC_DAT.ENC_P -CH34_ADC_DAT.ENC_N
differential pair CH34_ADC_DAT.FRAMESTART: +CH34_ADC_DAT.FRAMESTART_P -CH34_ADC_DAT.FRAMESTART_N
differential pair CH34_ADC_DAT.OUT1A: +CH34_ADC_DAT.OUT1A_P -CH34_ADC_DAT.OUT1A_N
differential pair CH34_ADC_DAT.OUT1B: +CH34_ADC_DAT.OUT1B_P -CH34_ADC_DAT.OUT1B_N
differential pair CH34_ADC_DAT.OUT2A: +CH34_ADC_DAT.OUT2A_P -CH34_ADC_DAT.OUT2A_N
differential pair CH34_ADC_DAT.OUT2B: +CH34_ADC_DAT.OUT2B_P -CH34_ADC_DAT.OUT2B_N

## Components (designator, comment, footprint, x,y, rotation, side; value= is the part's Value field where it differs from the comment)
AmpN1A "TestPoint" TP-3520-SK 874.11,4767.28 r270 top (schematic designator AmpN1)
AmpN1B "TestPoint" TP-3520-SK 873.86,4300.62 r270 top (schematic designator AmpN1)
AmpN1C "TestPoint" TP-3520-SK 874.31,2822.65 r270 top (schematic designator AmpN1)
AmpN1D "TestPoint" TP-3520-SK 874.92,3290.62 r270 top (schematic designator AmpN1)
AmpN1E "TestPoint" TP-3520-SK 1330.61,2034.97 r270 top (schematic designator AmpN1)
AmpN1F "TestPoint" TP-3520-SK 1331,1567.26 r270 top (schematic designator AmpN1)
AmpN1G "TestPoint" TP-3520-SK 1330.61,88.26 r270 top (schematic designator AmpN1)
AmpN1H "TestPoint" TP-3520-SK 1330.61,554.97 r270 top (schematic designator AmpN1)
AmpP1A "TestPoint" TP-3520-SK 881.11,5136.02 r270 top (schematic designator AmpP1)
AmpP1B "TestPoint" TP-3520-SK 880.86,4669.36 r270 top (schematic designator AmpP1)
AmpP1C "TestPoint" TP-3520-SK 881.31,3191.39 r270 top (schematic designator AmpP1)
AmpP1D "TestPoint" TP-3520-SK 881.92,3659.36 r270 top (schematic designator AmpP1)
AmpP1E "TestPoint" TP-3520-SK 1337.61,2403.71 r270 top (schematic designator AmpP1)
AmpP1F "TestPoint" TP-3520-SK 1338,1936 r270 top (schematic designator AmpP1)
AmpP1G "TestPoint" TP-3520-SK 1337.61,457 r270 top (schematic designator AmpP1)
AmpP1H "TestPoint" TP-3520-SK 1337.61,923.71 r270 top (schematic designator AmpP1)
BuckSyncA "TestPoint" TP-3520-SK 3624.99,3181.01 r180 top (schematic designator BuckSync)
BuckSyncB "TestPoint" TP-3520-SK 3624.99,1628.63 r180 top (schematic designator BuckSync)
C1A "2.2uF" 0603 467.68,4013.38 r0 bottom (schematic designator C1)
C1B "2.2uF" 0603 907.37,1283.74 r0 bottom (schematic designator C1)
C2A "0.1uF, 0402" 0402 439.83,4070.11 r180 bottom (schematic designator C2)
C2B "0.1uF, 0402" 0402 879.52,1340.46 r180 bottom (schematic designator C2)
C3A "0.1uF, 0402" 0402 539.45,3883.77 r0 bottom (schematic designator C3)
C3B "0.1uF, 0402" 0402 979.14,1154.12 r0 bottom (schematic designator C3)
C4A "2.2uF" 0603 511.6,3946.49 r180 bottom (schematic designator C4)
C4B "2.2uF" 0603 951.29,1216.84 r180 bottom (schematic designator C4)
C5A "4.7uF, 10V" 0805 1015.11,4085.77 r90 top (schematic designator C5)
C5B "4.7uF, 10V" 0805 1474.8,1356.12 r90 top (schematic designator C5)
C6A "10nF" 0603 1050.11,4038.77 r0 bottom (schematic designator C6)
C6B "10nF" 0603 1509.8,1309.12 r0 bottom (schematic designator C6)
C7A "0.1uF, 0402" 0402 1091.11,4215.77 r180 top (schematic designator C7)
C7B "0.1uF, 0402" 0402 1550.8,1486.12 r180 top (schematic designator C7)
C8A "0.1uF, 0402" 0402 1559.11,3745.05 r0 top (schematic designator C8)
C8B "0.1uF, 0402" 0402 2018.8,1015.4 r0 top (schematic designator C8)
C9A "2.2uF" 0603 586.11,4171.05 r180 bottom (schematic designator C9)
C9B "2.2uF" 0603 1025.8,1441.4 r180 bottom (schematic designator C9)
C10A "0.1uF, 0402" 0402 539.83,4115.11 r0 bottom (schematic designator C10)
C10B "0.1uF, 0402" 0402 979.52,1385.46 r0 bottom (schematic designator C10)
C11A "0.1uF, 0402" 0402 439.45,3838.77 r180 bottom (schematic designator C11)
C11B "0.1uF, 0402" 0402 879.14,1109.12 r180 bottom (schematic designator C11)
C12A "2.2uF" 0603 393.17,3782.82 r0 bottom (schematic designator C12)
C12B "2.2uF" 0603 832.86,1053.17 r0 bottom (schematic designator C12)
C13A "4.7uF, 10V" 0805 1117.11,4155.77 r270 top (schematic designator C13)
C13B "4.7uF, 10V" 0805 1576.8,1426.12 r270 top (schematic designator C13)
C14A "0.1uF, 0402" 0402 1310.11,4097.68 r90 bottom (schematic designator C14)
C14B "0.1uF, 0402" 0402 1769.8,1368.03 r90 bottom (schematic designator C14)
C15A "0.1uF, 0402" 0402 1269.11,3831.42 r270 bottom (schematic designator C15)
C15B "0.1uF, 0402" 0402 1728.8,1101.77 r270 bottom (schematic designator C15)
C16A "0.1uF, 0402" 0402 1312.11,3831.42 r270 bottom (schematic designator C16)
C16B "0.1uF, 0402" 0402 1771.8,1101.77 r270 bottom (schematic designator C16)
C17A "0.1uF, 0402" 0402 1266.11,4097.68 r90 bottom (schematic designator C17)
C17B "0.1uF, 0402" 0402 1725.8,1368.03 r90 bottom (schematic designator C17)
C18A "0.1uF, 0402" 0402 1559.11,3789.81 r0 top (schematic designator C18)
C18B "0.1uF, 0402" 0402 2018.8,1060.16 r0 top (schematic designator C18)
C19A "0.1uF, 0402" 0402 1523.48,3974.44 r180 bottom (schematic designator C19)
C19B "0.1uF, 0402" 0402 1985.17,1244.8 r180 bottom (schematic designator C19)
C20A "120pF, 0402" 0402 807.88,4082.12 r90 top (schematic designator C20)
C20B "120pF, 0402" 0402 1267.57,1352.47 r90 top (schematic designator C20)
C21A "200pF, 0402" 0402 854.88,4082.49 r90 top (schematic designator C21)
C21B "200pF, 0402" 0402 1314.57,1352.84 r90 top (schematic designator C21)
C22A "120pF, 0402" 0402 900.88,4082.12 r90 top (schematic designator C22)
C22B "120pF, 0402" 0402 1360.57,1352.47 r90 top (schematic designator C22)
C23A "DNL" 0603 396.11,4171.05 r0 bottom (schematic designator C23)
C23B "DNL" 0603 835.8,1441.4 r0 bottom (schematic designator C23)
C24A "0.1uF, 0402" 0402 439.83,4115.11 r180 bottom (schematic designator C24)
C24B "0.1uF, 0402" 0402 879.52,1385.46 r180 bottom (schematic designator C24)
C25A "120pF, 0402" 0402 808.88,3818.12 r90 top (schematic designator C25)
C25B "120pF, 0402" 0402 1268.57,1088.47 r90 top (schematic designator C25)
C26A "200pF, 0402" 0402 854.88,3818.12 r90 top (schematic designator C26)
C26B "200pF, 0402" 0402 1314.57,1088.47 r90 top (schematic designator C26)
C27A "120pF, 0402" 0402 900.88,3818.49 r90 top (schematic designator C27)
C27B "120pF, 0402" 0402 1360.57,1088.84 r90 top (schematic designator C27)
C28A "2.2uF" 0603 1369.11,4127.05 r0 bottom (schematic designator C28)
C28B "2.2uF" 0603 1828.8,1397.4 r0 bottom (schematic designator C28)
C29A "DNL" 0603 583.17,3784.82 r180 bottom (schematic designator C29)
C29B "DNL" 0603 1022.86,1055.17 r180 bottom (schematic designator C29)
C30A "0.1uF, 0402" 0402 539.45,3838.77 r0 bottom (schematic designator C30)
C30B "0.1uF, 0402" 0402 979.14,1109.12 r0 bottom (schematic designator C30)
C31A "CLLE1AX7S0G225M/0.95" CLLE1 1164.11,3965.05 r270 top (schematic designator C31)
C31B "CLLE1AX7S0G225M/0.95" CLLE1 1623.8,1235.4 r270 top (schematic designator C31)
C32A "0.1uF, 0402" 0402 1065.74,3987.05 r0 top (schematic designator C32)
C32B "0.1uF, 0402" 0402 1525.43,1257.4 r0 top (schematic designator C32)
C33A "0.1uF, 0402" 0402 1065.74,3942.05 r0 top (schematic designator C33)
C33B "0.1uF, 0402" 0402 1525.43,1212.4 r0 top (schematic designator C33)
C34A "0.1uF, 0402" 0402 1223.11,4106.42 r270 bottom (schematic designator C34)
C34B "0.1uF, 0402" 0402 1682.8,1376.77 r270 bottom (schematic designator C34)
C35A "0.1uF, 0402" 0402 1225.11,3824.05 r90 bottom (schematic designator C35)
C35B "0.1uF, 0402" 0402 1684.8,1094.4 r90 bottom (schematic designator C35)
C36A "0.1uF, 0402" 0402 1376.11,4934.65 r0 bottom (schematic designator C36)
C36B "0.1uF, 0402" 0402 1375.86,4467.99 r0 bottom (schematic designator C36)
C36C "0.1uF, 0402" 0402 1376.31,2990.02 r0 bottom (schematic designator C36)
C36D "0.1uF, 0402" 0402 1376.92,3457.99 r0 bottom (schematic designator C36)
C36E "0.1uF, 0402" 0402 1832.61,2202.34 r0 bottom (schematic designator C36)
C36F "0.1uF, 0402" 0402 1833,1734.63 r0 bottom (schematic designator C36)
C36G "0.1uF, 0402" 0402 1832.61,255.63 r0 bottom (schematic designator C36)
C36H "0.1uF, 0402" 0402 1832.61,722.34 r0 bottom (schematic designator C36)
C37A "0.1uF, 0402" 0402 1363.11,4989.65 r0 bottom (schematic designator C37)
C37B "0.1uF, 0402" 0402 1362.86,4522.99 r0 bottom (schematic designator C37)
C37C "0.1uF, 0402" 0402 1363.31,3045.02 r0 bottom (schematic designator C37)
C37D "0.1uF, 0402" 0402 1363.92,3512.99 r0 bottom (schematic designator C37)
C37E "0.1uF, 0402" 0402 1819.61,2257.34 r0 bottom (schematic designator C37)
C37F "0.1uF, 0402" 0402 1820,1789.63 r0 bottom (schematic designator C37)
C37G "0.1uF, 0402" 0402 1819.61,310.63 r0 bottom (schematic designator C37)
C37H "0.1uF, 0402" 0402 1819.61,777.34 r0 bottom (schematic designator C37)
C38A "12pF, 0402" 0402 1050.11,5027.65 r0 bottom (schematic designator C38)
C38B "12pF, 0402" 0402 1049.86,4560.99 r0 bottom (schematic designator C38)
C38C "12pF, 0402" 0402 1050.31,3083.02 r0 bottom (schematic designator C38)
C38D "12pF, 0402" 0402 1050.92,3550.99 r0 bottom (schematic designator C38)
C38E "12pF, 0402" 0402 1506.61,2295.34 r0 bottom (schematic designator C38)
C38F "12pF, 0402" 0402 1507,1827.63 r0 bottom (schematic designator C38)
C38G "12pF, 0402" 0402 1506.61,348.63 r0 bottom (schematic designator C38)
C38H "12pF, 0402" 0402 1506.61,815.34 r0 bottom (schematic designator C38)
C39A "12pF, 0402" 0402 411.07,5158.65 r270 top (schematic designator C39)
C39B "12pF, 0402" 0402 410.82,4691.99 r270 top (schematic designator C39)
C39C "12pF, 0402" 0402 411.27,3214.02 r270 top (schematic designator C39)
C39D "12pF, 0402" 0402 411.88,3681.99 r270 top (schematic designator C39)
C39E "12pF, 0402" 0402 867.57,2426.34 r270 top (schematic designator C39)
C39F "12pF, 0402" 0402 867.96,1958.63 r270 top (schematic designator C39)
C39G "12pF, 0402" 0402 867.57,483.63 r270 top (schematic designator C39)
C39H "12pF, 0402" 0402 867.57,946.34 r270 top (schematic designator C39)
C40A "0.1uF, 0402" 0402 1091.48,4961.65 r180 bottom (schematic designator C40)
C40B "0.1uF, 0402" 0402 1091.23,4494.99 r180 bottom (schematic designator C40)
C40C "0.1uF, 0402" 0402 1091.68,3017.02 r180 bottom (schematic designator C40)
C40D "0.1uF, 0402" 0402 1092.29,3484.99 r180 bottom (schematic designator C40)
C40E "0.1uF, 0402" 0402 1547.98,2229.34 r180 bottom (schematic designator C40)
C40F "0.1uF, 0402" 0402 1548.37,1761.63 r180 bottom (schematic designator C40)
C40G "0.1uF, 0402" 0402 1547.98,282.63 r180 bottom (schematic designator C40)
C40H "0.1uF, 0402" 0402 1547.98,749.34 r180 bottom (schematic designator C40)
C41A "12pF, 0402" 0402 411.07,4748.65 r90 top (schematic designator C41)
C41B "12pF, 0402" 0402 410.82,4281.99 r90 top (schematic designator C41)
C41C "12pF, 0402" 0402 411.27,2804.02 r90 top (schematic designator C41)
C41D "12pF, 0402" 0402 411.88,3271.99 r90 top (schematic designator C41)
C41E "12pF, 0402" 0402 867.57,2016.34 r90 top (schematic designator C41)
C41F "12pF, 0402" 0402 867.96,1548.63 r90 top (schematic designator C41)
C41G "12pF, 0402" 0402 867.57,73.63 r90 top (schematic designator C41)
C41H "12pF, 0402" 0402 867.57,536.34 r90 top (schematic designator C41)
C42A "12pF, 0402" 0402 1003.11,4869.65 r0 bottom (schematic designator C42)
C42B "12pF, 0402" 0402 1002.86,4402.99 r0 bottom (schematic designator C42)
C42C "12pF, 0402" 0402 1003.31,2925.02 r0 bottom (schematic designator C42)
C42D "12pF, 0402" 0402 1003.92,3392.99 r0 bottom (schematic designator C42)
C42E "12pF, 0402" 0402 1459.61,2137.34 r0 bottom (schematic designator C42)
C42F "12pF, 0402" 0402 1460,1669.63 r0 bottom (schematic designator C42)
C42G "12pF, 0402" 0402 1459.61,190.63 r0 bottom (schematic designator C42)
C42H "12pF, 0402" 0402 1459.61,657.34 r0 bottom (schematic designator C42)
C43A "4.7uF, 10V" 0805 343.61,5094.65 r0 bottom (schematic designator C43)
C43B "4.7uF, 10V" 0805 343.37,4627.99 r0 bottom (schematic designator C43)
C43C "4.7uF, 10V" 0805 343.81,3150.02 r0 bottom (schematic designator C43)
C43D "4.7uF, 10V" 0805 344.43,3617.99 r0 bottom (schematic designator C43)
C43E "4.7uF, 10V" 0805 800.12,2362.34 r0 bottom (schematic designator C43)
C43F "4.7uF, 10V" 0805 800.5,1894.63 r0 bottom (schematic designator C43)
C43G "4.7uF, 10V" 0805 800.12,415.63 r0 bottom (schematic designator C43)
C43H "4.7uF, 10V" 0805 800.12,882.34 r0 bottom (schematic designator C43)
C44A "0.1uF, 0402" 0402 380.32,5023.29 r0 bottom (schematic designator C44)
C44B "0.1uF, 0402" 0402 380.08,4556.62 r0 bottom (schematic designator C44)
C44C "0.1uF, 0402" 0402 380.52,3078.66 r0 bottom (schematic designator C44)
C44D "0.1uF, 0402" 0402 381.14,3546.62 r0 bottom (schematic designator C44)
C44E "0.1uF, 0402" 0402 836.83,2290.98 r0 bottom (schematic designator C44)
C44F "0.1uF, 0402" 0402 837.21,1823.27 r0 bottom (schematic designator C44)
C44G "0.1uF, 0402" 0402 836.83,344.27 r0 bottom (schematic designator C44)
C44H "0.1uF, 0402" 0402 836.83,810.98 r0 bottom (schematic designator C44)
C45A "4.7uF, 10V" 0805 343.61,4812.65 r0 bottom (schematic designator C45)
C45B "4.7uF, 10V" 0805 343.37,4345.99 r0 bottom (schematic designator C45)
C45C "4.7uF, 10V" 0805 343.81,2868.02 r0 bottom (schematic designator C45)
C45D "4.7uF, 10V" 0805 344.43,3335.99 r0 bottom (schematic designator C45)
C45E "4.7uF, 10V" 0805 800.12,2080.34 r0 bottom (schematic designator C45)
C45F "4.7uF, 10V" 0805 800.5,1612.63 r0 bottom (schematic designator C45)
C45G "4.7uF, 10V" 0805 800.12,133.63 r0 bottom (schematic designator C45)
C45H "4.7uF, 10V" 0805 800.12,600.34 r0 bottom (schematic designator C45)
C46A "0.1uF, 0402" 0402 380.32,4884.01 r0 bottom (schematic designator C46)
C46B "0.1uF, 0402" 0402 380.08,4417.35 r0 bottom (schematic designator C46)
C46C "0.1uF, 0402" 0402 380.52,2939.38 r0 bottom (schematic designator C46)
C46D "0.1uF, 0402" 0402 381.14,3407.35 r0 bottom (schematic designator C46)
C46E "0.1uF, 0402" 0402 836.83,2151.7 r0 bottom (schematic designator C46)
C46F "0.1uF, 0402" 0402 837.21,1683.99 r0 bottom (schematic designator C46)
C46G "0.1uF, 0402" 0402 836.83,204.99 r0 bottom (schematic designator C46)
C46H "0.1uF, 0402" 0402 836.83,671.7 r0 bottom (schematic designator C46)
C47A "4.7uF, 10V" 0805 1460.11,4791.65 r180 bottom (schematic designator C47)
C47B "4.7uF, 10V" 0805 1459.86,4324.99 r180 bottom (schematic designator C47)
C47C "4.7uF, 10V" 0805 1460.31,2847.02 r180 bottom (schematic designator C47)
C47D "4.7uF, 10V" 0805 1460.92,3314.99 r180 bottom (schematic designator C47)
C47E "4.7uF, 10V" 0805 1916.61,2059.34 r180 bottom (schematic designator C47)
C47F "4.7uF, 10V" 0805 1917,1591.63 r180 bottom (schematic designator C47)
C47G "4.7uF, 10V" 0805 1916.61,112.63 r180 bottom (schematic designator C47)
C47H "4.7uF, 10V" 0805 1916.61,579.34 r180 bottom (schematic designator C47)
C48A "0.1uF, 0402" 0402 1419.11,4855.45 r180 bottom (schematic designator C48)
C48B "0.1uF, 0402" 0402 1418.86,4388.79 r180 bottom (schematic designator C48)
C48C "0.1uF, 0402" 0402 1419.31,2910.82 r180 bottom (schematic designator C48)
C48D "0.1uF, 0402" 0402 1419.92,3378.79 r180 bottom (schematic designator C48)
C48E "0.1uF, 0402" 0402 1875.61,2123.14 r180 bottom (schematic designator C48)
C48F "0.1uF, 0402" 0402 1876,1655.43 r180 bottom (schematic designator C48)
C48G "0.1uF, 0402" 0402 1875.61,176.43 r180 bottom (schematic designator C48)
C48H "0.1uF, 0402" 0402 1875.61,643.14 r180 bottom (schematic designator C48)
C49A "4.7uF, 10V" 0805 1385.11,5060.25 r0 bottom (schematic designator C49)
C49B "4.7uF, 10V" 0805 1384.86,4593.59 r0 bottom (schematic designator C49)
C49C "4.7uF, 10V" 0805 1385.31,3115.62 r0 bottom (schematic designator C49)
C49D "4.7uF, 10V" 0805 1385.92,3583.59 r0 bottom (schematic designator C49)
C49E "4.7uF, 10V" 0805 1841.61,2327.94 r0 bottom (schematic designator C49)
C49F "4.7uF, 10V" 0805 1842,1860.23 r0 bottom (schematic designator C49)
C49G "4.7uF, 10V" 0805 1841.61,381.23 r0 bottom (schematic designator C49)
C49H "4.7uF, 10V" 0805 1841.61,847.94 r0 bottom (schematic designator C49)
C50A "0.1uF, 0402" 0402 1460.11,4934.65 r90 bottom (schematic designator C50)
C50B "0.1uF, 0402" 0402 1459.86,4467.99 r90 bottom (schematic designator C50)
C50C "0.1uF, 0402" 0402 1460.31,2990.02 r90 bottom (schematic designator C50)
C50D "0.1uF, 0402" 0402 1460.92,3457.99 r90 bottom (schematic designator C50)
C50E "0.1uF, 0402" 0402 1916.61,2202.34 r90 bottom (schematic designator C50)
C50F "0.1uF, 0402" 0402 1917,1734.63 r90 bottom (schematic designator C50)
C50G "0.1uF, 0402" 0402 1916.61,255.63 r90 bottom (schematic designator C50)
C50H "0.1uF, 0402" 0402 1916.61,722.34 r90 bottom (schematic designator C50)
C51A "0.1uF, 0402" 0402 2236.92,5143.58 r90 bottom (schematic designator C51)
C51B "0.1uF, 0402" 0402 2237.74,3666.92 r90 bottom (schematic designator C51)
C51C "0.1uF, 0402" 0402 2693.43,2411.27 r90 bottom (schematic designator C51)
C51D "0.1uF, 0402" 0402 2693.43,931.27 r90 bottom (schematic designator C51)
C52A "0.1uF, 0402" 0402 1906,5262.6 r180 bottom (schematic designator C52)
C52B "0.1uF, 0402" 0402 1904.7,3784.89 r180 bottom (schematic designator C52)
C52C "0.1uF, 0402" 0402 2360.39,2529.24 r180 bottom (schematic designator C52)
C52D "0.1uF, 0402" 0402 2360.39,1049.24 r180 bottom (schematic designator C52)
C53A "4.7uF, 10V" 0805 2282,4251 r180 bottom (schematic designator C53)
C53B "4.7uF, 10V" 0805 2282.81,2774.34 r180 bottom (schematic designator C53)
C53C "4.7uF, 10V" 0805 2738.5,1518.69 r180 bottom (schematic designator C53)
C53D "4.7uF, 10V" 0805 3368.81,44.19 r270 bottom (schematic designator C53)
C54 "0.1uF, 0402" 0402 3468.99,3411.24 r0 top
C55A "4.7uF, 10V" 0805 2104,4273 r90 bottom (schematic designator C55)
C55B "4.7uF, 10V" 0805 2104.81,2796.34 r90 bottom (schematic designator C55)
C55C "4.7uF, 10V" 0805 2560.5,1540.69 r90 bottom (schematic designator C55)
C55D "4.7uF, 10V" 0805 2866.53,-10.93 r0 bottom (schematic designator C55)
C56A "33uF" CC3225-1210 3465.99,2878.89 r270 top (schematic designator C56)
C56B "33uF" CC3225-1210 3465.99,1326.51 r270 top (schematic designator C56)
C57A "0.1uF, 0402" 0402 3502.36,3161.01 r180 top (schematic designator C57)
C57B "0.1uF, 0402" 0402 3502.36,1608.63 r180 top (schematic designator C57)
C58 "0.1uF, 0402" 0402 3363.36,670.29 r180 bottom
C59A "0.33uF, 0402" 0402 3358.87,2866.58 r90 bottom (schematic designator C59)
C59B "0.33uF, 0402" 0402 3358.87,1314.21 r90 bottom (schematic designator C59)
C60 "0.1uF, 0402" 0402 3368.36,216.82 r180 bottom
C61A "33uF" TANT4532 3593.99,2945.01 r270 top (schematic designator C61)
C61B "33uF" TANT4532 3593.99,1392.63 r270 top (schematic designator C61)
C62A "12pF, 0402" 0402 3452.99,2957.01 r0 bottom (schematic designator C62)
C62B "12pF, 0402" 0402 3452.99,1404.63 r0 bottom (schematic designator C62)
C63 "0.1uF, 0402" 0402 3365.74,443.91 r180 bottom
C65A "2.2uF" 0603 3483.99,3115.01 r90 bottom (schematic designator C65)
C65B "2.2uF" 0603 3483.99,1562.63 r90 bottom (schematic designator C65)
C66A "12pF, 0402" 0402 3270.62,2962.01 r0 bottom (schematic designator C66)
C66B "12pF, 0402" 0402 3270.62,1409.63 r0 bottom (schematic designator C66)
C67A "220pF" 0603 3300.99,2755.01 r0 bottom (schematic designator C67)
C67B "220pF" 0603 3300.99,1202.63 r0 bottom (schematic designator C67)
C68A "2.2uF" 0603 3341.99,3097.01 r0 bottom (schematic designator C68)
C68B "2.2uF" 0603 3341.99,1544.63 r0 bottom (schematic designator C68)
C69A "2.2uF" 0603 3312.99,3306.01 r0 bottom (schematic designator C69)
C69B "2.2uF" 0603 3312.99,1753.63 r0 bottom (schematic designator C69)
C72 "0.1uF, 0402" 0402 3658,3545.2 r90 top
C73 "0.1uF, 0402" 0402 3349.98,3462.24 r270 top
C77A "2.2uF" 0603 2021,5138.24 r180 bottom (schematic designator C77)
C77B "2.2uF" 0603 2019.7,3660.53 r180 bottom (schematic designator C77)
C77C "2.2uF" 0603 2475.39,2404.89 r180 bottom (schematic designator C77)
C77D "2.2uF" 0603 2475.39,924.89 r180 bottom (schematic designator C77)
C78 "33uF" CC3225-1210 3352.38,2464 r180 top
C79 "33uF" CC3225-1210 3334.38,1952 r0 top
C80A "0.1uF, 0402" 0402 1102.74,4870.65 r0 bottom (schematic designator C80)
C80B "0.1uF, 0402" 0402 1102.49,4403.99 r0 bottom (schematic designator C80)
C80C "0.1uF, 0402" 0402 1102.94,2926.02 r0 bottom (schematic designator C80)
C80D "0.1uF, 0402" 0402 1103.55,3393.99 r0 bottom (schematic designator C80)
C80E "0.1uF, 0402" 0402 1559.24,2138.34 r0 bottom (schematic designator C80)
C80F "0.1uF, 0402" 0402 1559.63,1670.63 r0 bottom (schematic designator C80)
C80G "0.1uF, 0402" 0402 1559.24,191.63 r0 bottom (schematic designator C80)
C80H "0.1uF, 0402" 0402 1559.24,658.34 r0 bottom (schematic designator C80)
C81 "33uF" CC3225-1210 3590.32,4269.99 r180 top
C82 "33uF" CC3225-1210 3599.55,3759.14 r180 top
C83A "4.7uF, 10V" 0805 1060.11,4804.65 r0 bottom (schematic designator C83)
C83B "4.7uF, 10V" 0805 1059.86,4337.99 r0 bottom (schematic designator C83)
C83C "4.7uF, 10V" 0805 1060.31,2860.02 r0 bottom (schematic designator C83)
C83D "4.7uF, 10V" 0805 1060.92,3327.99 r0 bottom (schematic designator C83)
C83E "4.7uF, 10V" 0805 1516.61,2072.34 r0 bottom (schematic designator C83)
C83F "4.7uF, 10V" 0805 1517,1604.63 r0 bottom (schematic designator C83)
C83G "4.7uF, 10V" 0805 1516.61,125.63 r0 bottom (schematic designator C83)
C83H "4.7uF, 10V" 0805 1516.61,592.34 r0 bottom (schematic designator C83)
C84A "10nF" 0402 1973.96,4860.22 r270 top (schematic designator C84)
C84B "10nF" 0402 1974.77,3383.56 r270 top (schematic designator C84)
C84C "10nF" 0402 2430.46,2127.91 r270 top (schematic designator C84)
C84D "10nF" 0402 2430.46,647.91 r270 top (schematic designator C84)
C85A "10nF" 0402 2196.93,4812.02 r90 top (schematic designator C85)
C85B "10nF" 0402 2197.75,3335.36 r90 top (schematic designator C85)
C85C "10nF" 0402 2653.44,2079.71 r90 top (schematic designator C85)
C85D "10nF" 0402 2653.44,599.71 r90 top (schematic designator C85)
C86A "10nF" 0402 1988.5,4545.85 r90 top (schematic designator C86)
C86B "10nF" 0402 1989.32,3069.19 r90 top (schematic designator C86)
C86C "10nF" 0402 2445.01,1813.54 r90 top (schematic designator C86)
C86D "10nF" 0402 2445.01,333.54 r90 top (schematic designator C86)
C87A "10nF" 0402 2202,4580.37 r270 top (schematic designator C87)
C87B "10nF" 0402 2202.81,3103.71 r270 top (schematic designator C87)
C87C "10nF" 0402 2658.5,1848.06 r270 top (schematic designator C87)
C87D "10nF" 0402 2658.5,368.06 r270 top (schematic designator C87)
C88A "2.2uF" 0603 770.11,5101.65 r0 bottom (schematic designator C88)
C88B "2.2uF" 0603 770.86,4633.99 r0 bottom (schematic designator C88)
C88C "2.2uF" 0603 770.31,3157.02 r0 bottom (schematic designator C88)
C88D "2.2uF" 0603 770.92,3624.99 r0 bottom (schematic designator C88)
C88E "2.2uF" 0603 1227.61,2369.34 r0 bottom (schematic designator C88)
C88F "2.2uF" 0603 1229,1901.63 r0 bottom (schematic designator C88)
C88G "2.2uF" 0603 1230.61,417.63 r0 bottom (schematic designator C88)
C88H "2.2uF" 0603 1226.61,889.34 r0 bottom (schematic designator C88)
C89A "0.1uF, 0402" 0402 830.11,5021.65 r0 top (schematic designator C89)
C89B "0.1uF, 0402" 0402 829.86,4554.99 r0 top (schematic designator C89)
C89C "0.1uF, 0402" 0402 830.31,3077.02 r0 top (schematic designator C89)
C89D "0.1uF, 0402" 0402 830.92,3544.99 r0 top (schematic designator C89)
C89E "0.1uF, 0402" 0402 1286.61,2289.34 r0 top (schematic designator C89)
C89F "0.1uF, 0402" 0402 1287,1821.63 r0 top (schematic designator C89)
C89G "0.1uF, 0402" 0402 1286.61,342.63 r0 top (schematic designator C89)
C89H "0.1uF, 0402" 0402 1286.61,809.34 r0 top (schematic designator C89)
C90A "2.2uF" 0603 831.11,4805.65 r180 bottom (schematic designator C90)
C90B "2.2uF" 0603 830.86,4338.99 r180 bottom (schematic designator C90)
C90C "2.2uF" 0603 831.31,2861.02 r180 bottom (schematic designator C90)
C90D "2.2uF" 0603 831.92,3328.99 r180 bottom (schematic designator C90)
C90E "2.2uF" 0603 1287.61,2073.34 r180 bottom (schematic designator C90)
C90F "2.2uF" 0603 1288,1605.63 r180 bottom (schematic designator C90)
C90G "2.2uF" 0603 1287.61,126.63 r180 bottom (schematic designator C90)
C90H "2.2uF" 0603 1287.61,593.34 r180 bottom (schematic designator C90)
C91A "0.1uF, 0402" 0402 830.11,4890.65 r0 top (schematic designator C91)
C91B "0.1uF, 0402" 0402 829.86,4423.99 r0 top (schematic designator C91)
C91C "0.1uF, 0402" 0402 830.31,2946.02 r0 top (schematic designator C91)
C91D "0.1uF, 0402" 0402 830.92,3413.99 r0 top (schematic designator C91)
C91E "0.1uF, 0402" 0402 1286.61,2158.34 r0 top (schematic designator C91)
C91F "0.1uF, 0402" 0402 1287,1690.63 r0 top (schematic designator C91)
C91G "0.1uF, 0402" 0402 1286.61,211.63 r0 top (schematic designator C91)
C91H "0.1uF, 0402" 0402 1286.61,678.34 r0 top (schematic designator C91)
C92A "2.2uF" 0603 691.11,5098.65 r180 bottom (schematic designator C92)
C92B "2.2uF" 0603 692.86,4631.99 r180 bottom (schematic designator C92)
C92C "2.2uF" 0603 692.31,3154.02 r180 bottom (schematic designator C92)
C92D "2.2uF" 0603 692.92,3621.99 r180 bottom (schematic designator C92)
C92E "2.2uF" 0603 1154.61,2366.34 r180 bottom (schematic designator C92)
C92F "2.2uF" 0603 1151,1899.63 r180 bottom (schematic designator C92)
C92G "2.2uF" 0603 1147.61,419.63 r180 bottom (schematic designator C92)
C92H "2.2uF" 0603 1147.61,886.34 r180 bottom (schematic designator C92)
C93A "0.1uF, 0402" 0402 605.11,5017.65 r0 top (schematic designator C93)
C93B "0.1uF, 0402" 0402 604.86,4550.99 r0 top (schematic designator C93)
C93C "0.1uF, 0402" 0402 605.31,3073.02 r0 top (schematic designator C93)
C93D "0.1uF, 0402" 0402 605.92,3540.99 r0 top (schematic designator C93)
C93E "0.1uF, 0402" 0402 1061.61,2285.34 r0 top (schematic designator C93)
C93F "0.1uF, 0402" 0402 1062,1817.63 r0 top (schematic designator C93)
C93G "0.1uF, 0402" 0402 1061.61,338.63 r0 top (schematic designator C93)
C93H "0.1uF, 0402" 0402 1061.61,805.34 r0 top (schematic designator C93)
C94A "2.2uF" 0603 637.11,4805.65 r0 bottom (schematic designator C94)
C94B "2.2uF" 0603 636.86,4338.99 r0 bottom (schematic designator C94)
C94C "2.2uF" 0603 637.31,2861.02 r0 bottom (schematic designator C94)
C94D "2.2uF" 0603 637.92,3328.99 r0 bottom (schematic designator C94)
C94E "2.2uF" 0603 1093.61,2073.34 r0 bottom (schematic designator C94)
C94F "2.2uF" 0603 1094,1605.63 r0 bottom (schematic designator C94)
C94G "2.2uF" 0603 1093.61,126.63 r0 bottom (schematic designator C94)
C94H "2.2uF" 0603 1093.61,593.34 r0 bottom (schematic designator C94)
C95A "0.1uF, 0402" 0402 603.65,4889.65 r0 top (schematic designator C95)
C95B "0.1uF, 0402" 0402 603.41,4422.99 r0 top (schematic designator C95)